# EAGLE board LiPower-Shield-Panel-v11 (EAGLE 6.6.0), part 1 of 2
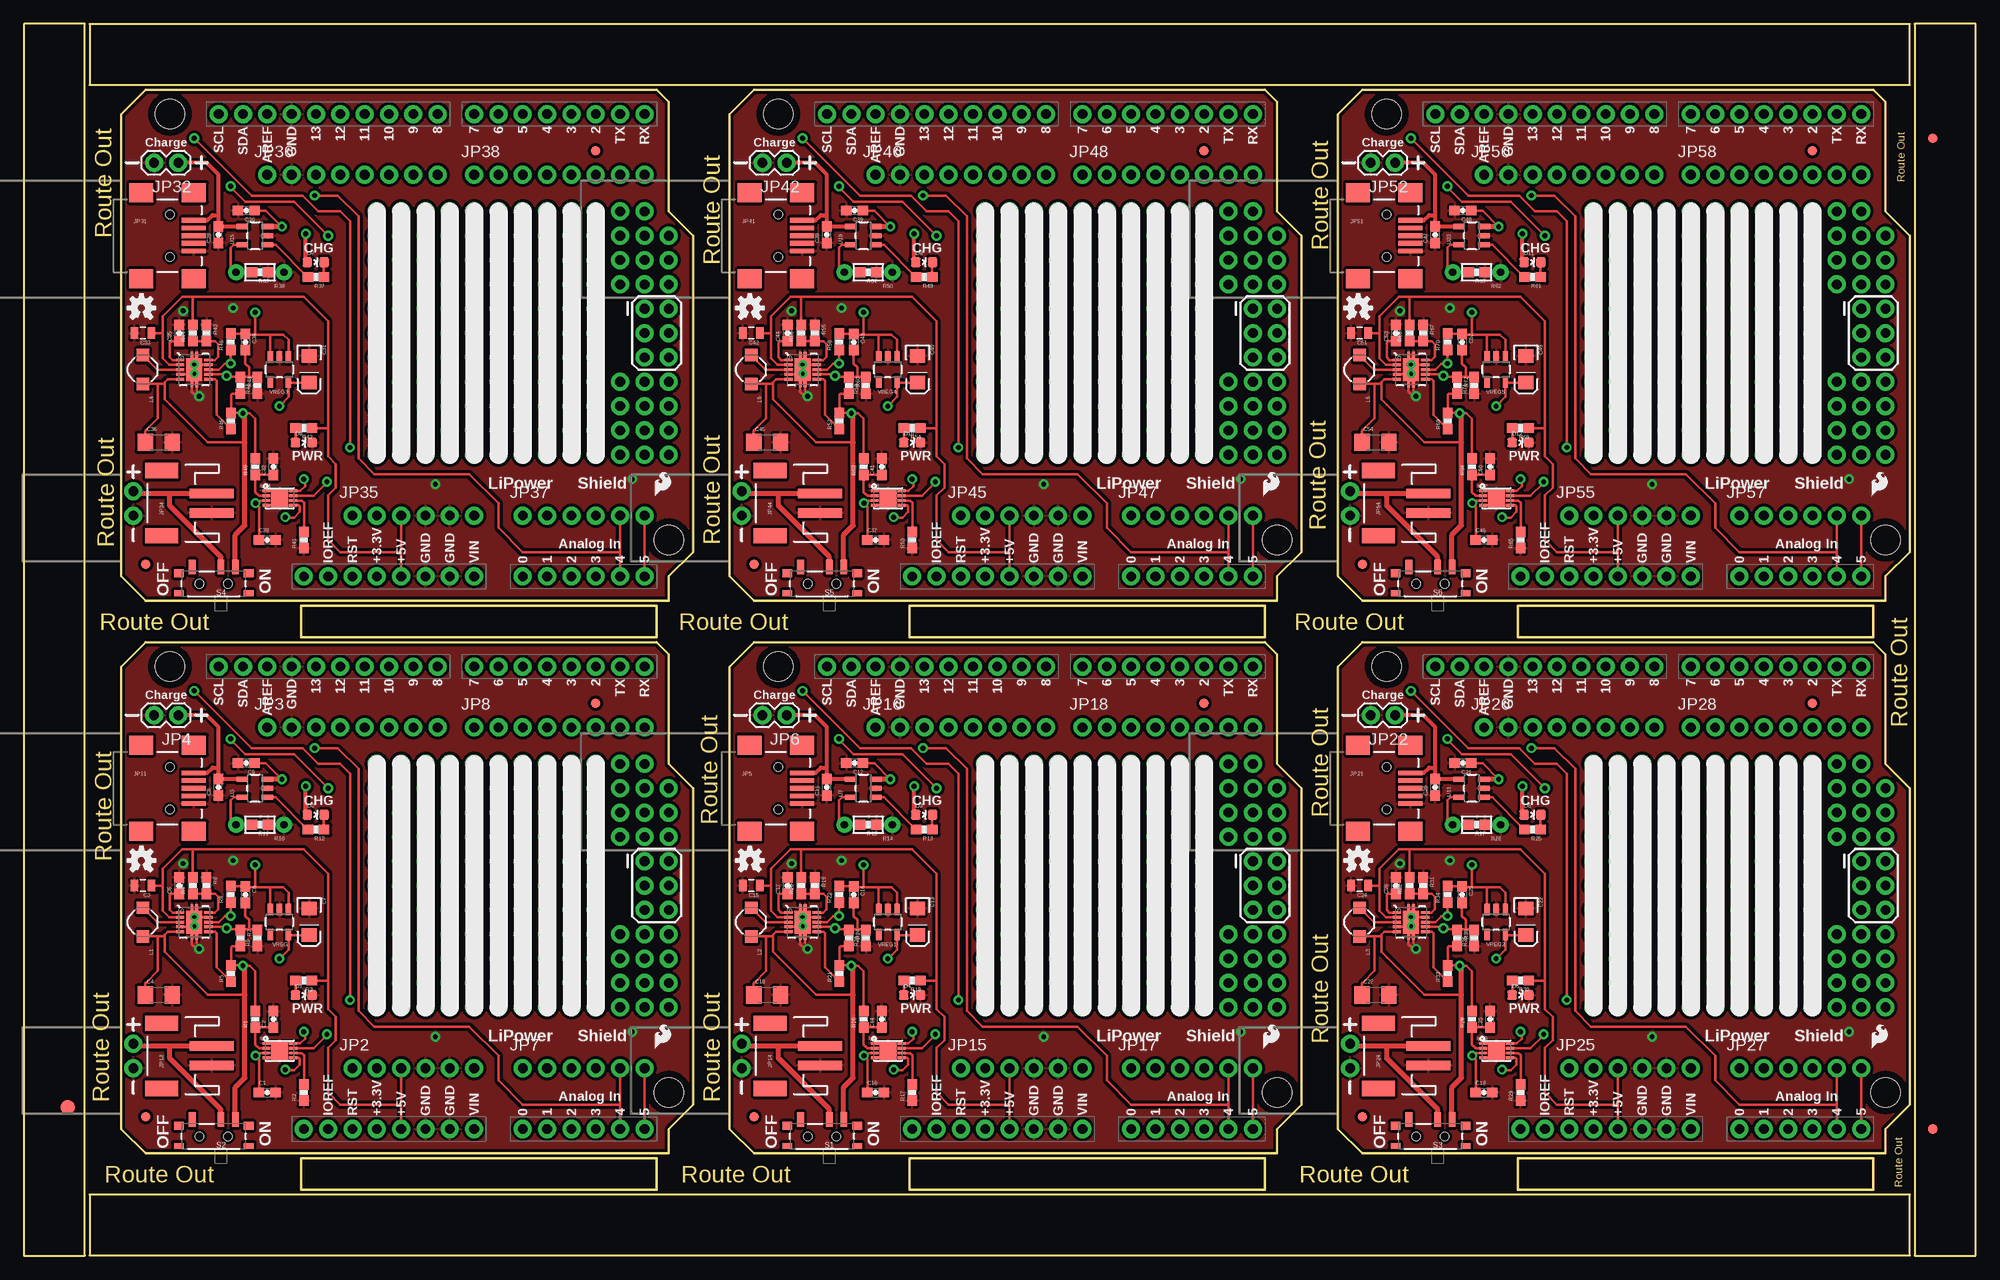
[diagram p0: board, top side]
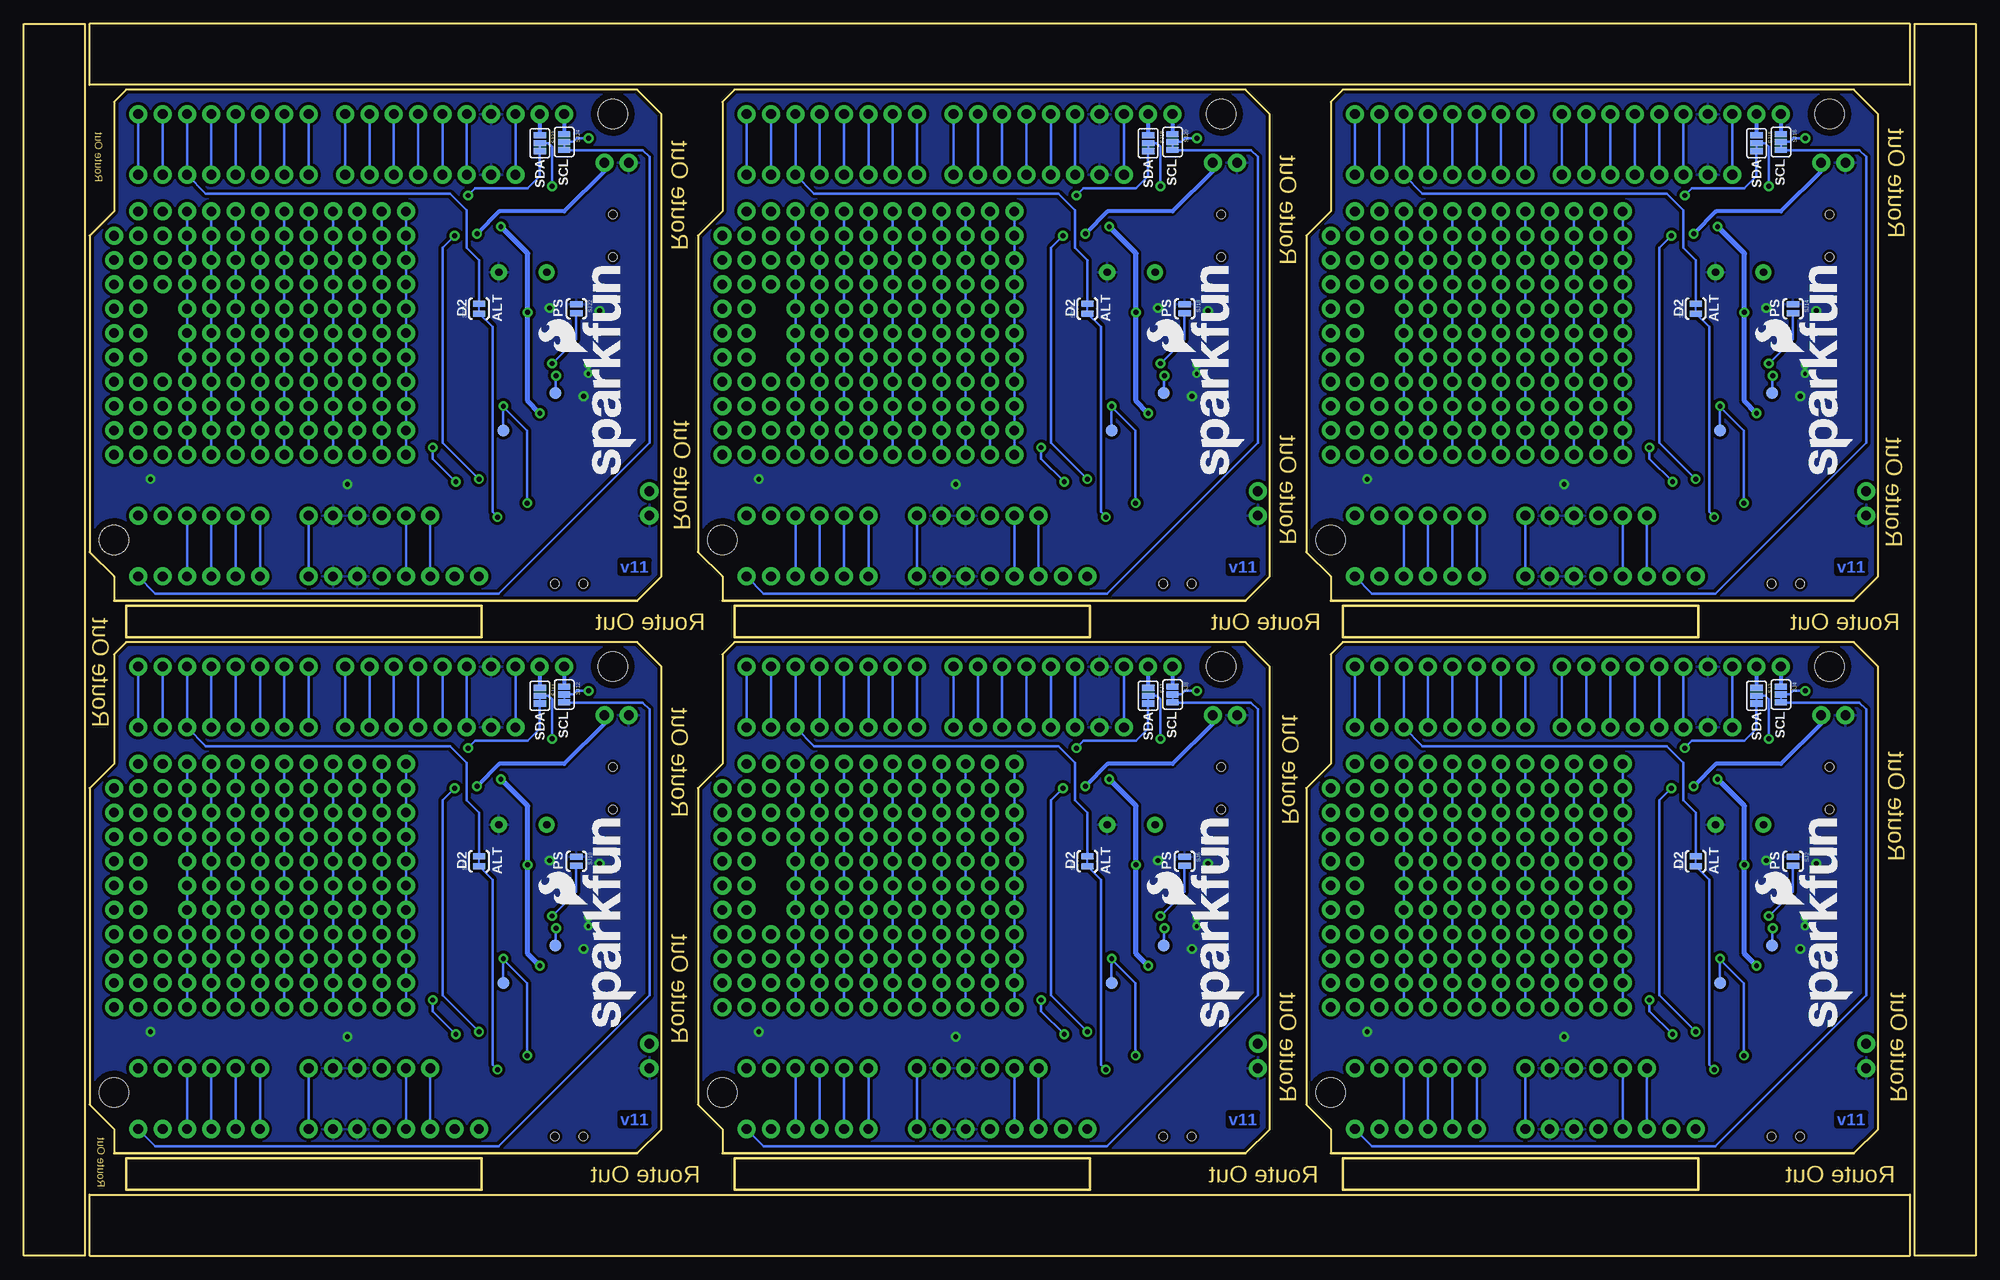
[diagram p1: board, bottom side, seen from below]

Size 203.71 x 128.52 mm. Coordinates in mm from the lower left corner, seen from the top.
Outline: 10.16,13.21 10.16,61.47 12.7,64.01 66.04,64.01 67.31,62.74 67.31,51.31 69.85,48.77 69.85,15.75 67.31,13.21 67.31,10.67 12.7,10.67 10.16,13.21
Outline: 73.66,13.21 73.66,61.47 76.2,64.01 129.54,64.01 130.81,62.74 130.81,51.31 133.35,48.77 133.35,15.75 130.81,13.21 130.81,10.67 76.2,10.67 73.66,13.21
Outline: 137.16,13.21 137.16,61.47 139.7,64.01 193.04,64.01 194.31,62.74 194.31,51.31 196.85,48.77 196.85,15.75 194.31,13.21 194.31,10.67 139.7,10.67 137.16,13.21
Outline: 66.04,10.16 28.96,10.16 28.96,6.86 66.04,6.86 66.04,10.16
Outline: 129.54,10.16 92.46,10.16 92.46,6.86 129.54,6.86 129.54,10.16
Outline: 193.04,10.16 155.96,10.16 155.96,6.86 193.04,6.86 193.04,10.16
Outline: 10.16,70.87 10.16,119.13 12.7,121.67 66.04,121.67 67.31,120.4 67.31,108.97 69.85,106.43 69.85,73.41 67.31,70.87 67.31,68.33 12.7,68.33 10.16,70.87
Outline: 73.66,70.87 73.66,119.13 76.2,121.67 129.54,121.67 130.81,120.4 130.81,108.97 133.35,106.43 133.35,73.41 130.81,70.87 130.81,68.33 76.2,68.33 73.66,70.87
Outline: 137.16,70.87 137.16,119.13 139.7,121.67 193.04,121.67 194.31,120.4 194.31,108.97 196.85,106.43 196.85,73.41 194.31,70.87 194.31,68.33 139.7,68.33 137.16,70.87
Outline: 66.04,67.82 28.96,67.82 28.96,64.52 66.04,64.52 66.04,67.82
Outline: 129.54,67.82 92.46,67.82 92.46,64.52 129.54,64.52 129.54,67.82
Outline: 193.04,67.82 155.96,67.82 155.96,64.52 193.04,64.52 193.04,67.82
Outline: 6.35,0 6.35,128.52 0,128.52 0,0 6.35,0
Outline: 6.86,122.17 196.85,122.17 196.85,128.52 6.86,128.52 6.86,122.17
Outline: 6.86,6.35 6.86,0 196.85,0 196.85,6.35 6.86,6.35
Outline: 203.71,0 203.71,128.52 197.36,128.52 197.36,0 203.71,0
Copper layers (1*16): Top 0.035mm / dielectric 1.5mm / Bottom 0.035mm
Design rules "SparkFun-2-layer": minimum track width 7mil, minimum drill 15mil, track to track 8mil, track to pad 8mil, pad to pad 8mil, via to via 8mil, smd to smd 8mil, copper to edge 8mil, drill to drill 8mil, minimum pad ring 12mil, minimum via ring 10mil, stop-mask expansion 4mil, vias tented up to drill 20mil, thermal gap 10mil

## Footprints (pad centres in the part's own frame; a part is rotated, then mirrored left to right if it is on the bottom)
0603-CAP = smd 1.1 x 1: 1 -0.85,0; 2 0.85,0
0805 = smd 0.8 x 1.2: 1 -0.9,0; 2 0.9,0
1206 = smd 1.6 x 1.8: 1 -1.4,0; 2 1.4,0
EIA3216 = smd 1.4 x 1.6: A 1.4,0; C -1.4,0
LED-0603 = smd 1 x 1: A 0,-0.877; C 0,0.877
FIDUCIAL-1.5X3 = smd 1.5 x 1.5: 1 0,0
FIDUCIAL-1X2 = smd 1 x 1: 1 0,0
1X02_NO_SILK = drill 1.016 pad 1.88: 1 0,0; 2 2.54,0
1X06_NO_SILK = drill 1.016 pad 1.88: 1 0,0; 2 2.54,0; 3 5.08,0; 4 7.62,0; 5 10.16,0; 6 12.7,0
1X08_NO_SILK = drill 1.016 pad 1.88: 1 0,0; 2 2.54,0; 3 5.08,0; 4 7.62,0; 5 10.16,0; 6 12.7,0; 7 15.24,0; 8 17.78,0
1X02 = drill 1.016 pad 1.88: 1 0,0; 2 2.54,0
USB-MINIB = smd 2.5 x 0.5: D+ 2.5,0; D- 2.5,0.8; GND 2.5,-1.6; ID 2.5,-0.8; VBUS 2.5,1.6 | smd 2.5 x 2: MTN1 -3,4.5; MTN2 2.5,4.5; MTN3 -3,-4.5; MTN4 2.5,-4.5 | hole 0.9: 0,2.2; 0,-2.2
STAND-OFF-TIGHT = hole 3.048: 0,0
JST-2-SMD = smd 1 x 4.6: 1 -1,-3.7; 2 1,-3.7 | smd 1.6 x 3.4: NC1 -3.4,1.5; NC2 3.4,1.5
INDUCTOR_4.7UH = smd 1.3 x 1.3: P$1 -1.5,0; P$2 1.5,0
0603-RES = smd 1.1 x 1: 1 -0.85,0; 2 0.85,0
1/6W-RES = drill 0.762 pad 1.676: 1 -2.5,0; 2 2.5,0
SWITCH-SPST-SMD-A = smd 0.7 x 1.5: 1 -2.25,-1.75; 2 -0.75,-1.75; 3 2.25,-1.75 | smd 1 x 0.6: GND1 -3.65,1; GND3 3.65,1 | smd 1 x 0.8: GND2 -3.65,-1.1; GND4 3.65,-1.1 | hole 0.9: -1.5,0; 1.5,0
SJ_2S-TRACE = smd 0.635 x 1.27: 1 -0.508,0; 2 0.508,0
SJ_2S-NO = smd 0.635 x 1.27: 1 -0.45,0; 2 0.45,0
PAD-JUMPER-3-2OF3_NC_BY_TRACE_YES_SILK_FULL_BOX = smd 0.635 x 1.27: 1 -0.813,0; 2 0,0; 3 0.813,0
PAD.03X.05 = smd 1.27 x 1.27: P$1 0,0
TDFN-8 = smd 0.8 x 0.3: 1 -1.4,0.75; 2 -1.4,0.25; 3 -1.4,-0.25; 4 -1.4,-0.75; 5 1.4,-0.75; 6 1.4,-0.25; 7 1.4,0.25; 8 1.4,0.75 | smd 1.73 x 1.88: EP 0,0
QFN-10_PAD = smd 0.297 x 0.85: 1 -1,-1.475; 2 -0.5,-1.475; 3 0,-1.475; 4 0.5,-1.475; 5 1,-1.475; 6 1,1.475; 7 0.5,1.475; 8 0,1.475; 9 -0.5,1.475; 10 -1,1.475 | smd 0.7 x 0.28: 11 -1.5,0.25; 12 -1.5,-0.25; 13 1.5,0.25; 14 1.5,-0.25 | smd 2.4 x 1.65: 15 0,0
SOT23-5 = smd 0.55 x 1.2: 1 -0.95,-1.3; 2 0,-1.3; 3 0.95,-1.3; 4 0.95,1.3; 5 -0.95,1.3
UNO_R3_SHIELD = drill 1.016 pad 1.88: 3.3V 50.8,26.67; 5V 50.8,29.21; A0 50.8,41.91; A1 50.8,44.45; A2 50.8,46.99; A3 50.8,49.53; A4 50.8,52.07; A5 50.8,54.61; AREF 2.54,15.24; D2 2.54,49.53; D3 2.54,46.99; D4 2.54,44.45; D5 2.54,41.91; D6 2.54,39.37; D7 2.54,36.83; D8 2.54,33.02; D9 2.54,30.48; D10 2.54,27.94; D11 2.54,25.4; D12 2.54,22.86; D13 2.54,20.32; GND@0 50.8,31.75; GND@1 50.8,34.29; GND@2 2.54,17.78; IOREF 50.8,21.59; NC 50.8,19.05; RES 50.8,24.13; RX 2.54,54.61; SCL 2.54,10.16; SDA 2.54,12.7; TX 2.54,52.07; VIN 50.8,36.83

## Placement (x,y rotation side)
C1  10nF  [0603-CAP]  25.4,17.02 0 top
C2  1uF  [0603-CAP]  26.04,24.66 90 top
C3  22uF  [0805]  12.42,38.61 180 top
C4  10uF  [1206]  14.07,27.2 0 top
C5  0.1uF  [0603-CAP]  16.21,38.61 90 top
C6  0.1uF  [0603-CAP]  23.11,37.67 270 top
C7  10uF  [EIA3216]  29.77,34.84 270 top
C8  4.7uF  [0603-CAP]  20.3,48.87 90 top
C9  4.7uF  [0603-CAP]  23.19,51.38 180 top
C10  10nF  [0603-CAP]  88.9,17.02 0 top
C11  4.7uF  [0603-CAP]  83.8,48.87 90 top
C12  4.7uF  [0603-CAP]  86.69,51.38 180 top
C13  10uF  [EIA3216]  93.27,34.84 270 top
C14  1uF  [0603-CAP]  89.53,24.66 90 top
C15  22uF  [0805]  75.92,38.61 180 top
C16  0.1uF  [0603-CAP]  86.61,37.67 270 top
C17  0.1uF  [0603-CAP]  79.71,38.61 90 top
C18  10uF  [1206]  77.57,27.2 0 top
C19  10nF  [0603-CAP]  152.4,17.02 0 top
C20  4.7uF  [0603-CAP]  147.3,48.87 90 top
C21  4.7uF  [0603-CAP]  150.19,51.38 180 top
C22  10uF  [EIA3216]  156.77,34.84 270 top
C23  1uF  [0603-CAP]  153.03,24.66 90 top
C24  22uF  [0805]  139.42,38.61 180 top
C25  0.1uF  [0603-CAP]  150.11,37.67 270 top
C26  0.1uF  [0603-CAP]  143.21,38.61 90 top
C27  10uF  [1206]  141.07,27.2 0 top
C28  10nF  [0603-CAP]  25.4,74.68 0 top
C29  4.7uF  [0603-CAP]  20.3,106.53 90 top
C30  4.7uF  [0603-CAP]  23.19,109.04 180 top
C31  10uF  [EIA3216]  29.77,92.49 270 top
C32  1uF  [0603-CAP]  26.04,82.32 90 top
C33  22uF  [0805]  12.42,96.27 180 top
C34  0.1uF  [0603-CAP]  23.11,95.33 270 top
C35  0.1uF  [0603-CAP]  16.21,96.27 90 top
C36  10uF  [1206]  14.07,84.86 0 top
C37  10nF  [0603-CAP]  88.9,74.68 0 top
C38  4.7uF  [0603-CAP]  83.8,106.53 90 top
C39  4.7uF  [0603-CAP]  86.69,109.04 180 top
C40  10uF  [EIA3216]  93.27,92.49 270 top
C41  1uF  [0603-CAP]  89.53,82.32 90 top
C42  22uF  [0805]  75.92,96.27 180 top
C43  0.1uF  [0603-CAP]  86.61,95.33 270 top
C44  0.1uF  [0603-CAP]  79.71,96.27 90 top
C45  10uF  [1206]  77.57,84.86 0 top
C46  10nF  [0603-CAP]  152.4,74.68 0 top
C47  4.7uF  [0603-CAP]  147.3,106.53 90 top
C48  4.7uF  [0603-CAP]  150.19,109.04 180 top
C49  10uF  [EIA3216]  156.77,92.49 270 top
C50  1uF  [0603-CAP]  153.03,82.32 90 top
C51  22uF  [0805]  139.42,96.27 180 top
C52  0.1uF  [0603-CAP]  150.11,95.33 270 top
C53  0.1uF  [0603-CAP]  143.21,96.27 90 top
C54  10uF  [1206]  141.07,84.86 0 top
D1  RED  [LED-0603]  29.21,27.18 270 top
D2  RED  [LED-0603]  30.45,46 270 top
D3  RED  [LED-0603]  93.95,46 270 top
D4  RED  [LED-0603]  92.71,27.18 270 top
D5  RED  [LED-0603]  157.45,46 270 top
D6  RED  [LED-0603]  156.21,27.18 270 top
D7  RED  [LED-0603]  30.45,103.66 270 top
D8  RED  [LED-0603]  29.21,84.84 270 top
D9  RED  [LED-0603]  93.95,103.66 270 top
D10  RED  [LED-0603]  92.71,84.84 270 top
D11  RED  [LED-0603]  157.45,103.66 270 top
D12  RED  [LED-0603]  156.21,84.84 270 top
E$1  [FIDUCIAL-1.5X3]  4.57,15.49 0 top
E$6  [FIDUCIAL-1X2]  199.26,13.21 0 top
E$7  [FIDUCIAL-1X2]  199.26,116.59 180 top
FID1  FIDUCIAL1X2  [FIDUCIAL-1X2]  12.7,14.48 0 top
FID2  FIDUCIAL1X2  [FIDUCIAL-1X2]  59.69,57.66 0 top
FID3  FIDUCIAL1X2  [FIDUCIAL-1X2]  76.2,14.48 0 top
FID4  FIDUCIAL1X2  [FIDUCIAL-1X2]  123.19,57.66 0 top
FID5  FIDUCIAL1X2  [FIDUCIAL-1X2]  139.7,14.48 0 top
FID6  FIDUCIAL1X2  [FIDUCIAL-1X2]  186.69,57.66 0 top
FID7  FIDUCIAL1X2  [FIDUCIAL-1X2]  12.7,72.14 0 top
FID8  FIDUCIAL1X2  [FIDUCIAL-1X2]  59.69,115.32 0 top
FID9  FIDUCIAL1X2  [FIDUCIAL-1X2]  76.2,72.14 0 top
FID10  FIDUCIAL1X2  [FIDUCIAL-1X2]  123.19,115.32 0 top
FID11  FIDUCIAL1X2  [FIDUCIAL-1X2]  139.7,72.14 0 top
FID12  FIDUCIAL1X2  [FIDUCIAL-1X2]  186.69,115.32 0 top
JP1  [1X02_NO_SILK]  11.43,19.56 90 top
JP2  [1X06_NO_SILK]  34.29,19.56 0 top
JP3  [1X08_NO_SILK]  25.4,55.12 0 top
JP4  M02PTH  [1X02]  16.11,56.39 180 top
JP5  USBSMD  [USB-MINIB]  78.74,48.77 0 top
JP6  M02PTH  [1X02]  79.61,56.39 180 top
JP7  [1X06_NO_SILK]  52.07,19.56 0 top
JP8  [1X08_NO_SILK]  46.99,55.12 0 top
JP9  STAND-OFFTIGHT  [STAND-OFF-TIGHT]  15.24,61.47 0 top
JP10  STAND-OFFTIGHT  [STAND-OFF-TIGHT]  67.31,17.02 0 top
JP11  USBSMD  [USB-MINIB]  15.24,48.77 0 top
JP12  [1X02_NO_SILK]  74.93,19.56 90 top
JP13  [JST-2-SMD]  15.88,20.85 90 top
JP14  [JST-2-SMD]  79.38,20.85 90 top
JP15  [1X06_NO_SILK]  97.79,19.56 0 top
JP16  [1X08_NO_SILK]  88.9,55.12 0 top
JP17  [1X06_NO_SILK]  115.57,19.56 0 top
JP18  [1X08_NO_SILK]  110.49,55.12 0 top
JP19  STAND-OFFTIGHT  [STAND-OFF-TIGHT]  78.74,61.47 0 top
JP20  STAND-OFFTIGHT  [STAND-OFF-TIGHT]  130.81,17.02 0 top
JP21  USBSMD  [USB-MINIB]  142.24,48.77 0 top
JP22  M02PTH  [1X02]  143.11,56.39 180 top
JP23  [1X02_NO_SILK]  138.43,19.56 90 top
JP24  [JST-2-SMD]  142.88,20.85 90 top
JP25  [1X06_NO_SILK]  161.29,19.56 0 top
JP26  [1X08_NO_SILK]  152.4,55.12 0 top
JP27  [1X06_NO_SILK]  179.07,19.56 0 top
JP28  [1X08_NO_SILK]  173.99,55.12 0 top
JP29  STAND-OFFTIGHT  [STAND-OFF-TIGHT]  142.24,61.47 0 top
JP30  STAND-OFFTIGHT  [STAND-OFF-TIGHT]  194.31,17.02 0 top
JP31  USBSMD  [USB-MINIB]  15.24,106.43 0 top
JP32  M02PTH  [1X02]  16.11,114.05 180 top
JP33  [1X02_NO_SILK]  11.43,77.22 90 top
JP34  [JST-2-SMD]  15.88,78.51 90 top
JP35  [1X06_NO_SILK]  34.29,77.22 0 top
JP36  [1X08_NO_SILK]  25.4,112.78 0 top
JP37  [1X06_NO_SILK]  52.07,77.22 0 top
JP38  [1X08_NO_SILK]  46.99,112.78 0 top
JP39  STAND-OFFTIGHT  [STAND-OFF-TIGHT]  15.24,119.13 0 top
JP40  STAND-OFFTIGHT  [STAND-OFF-TIGHT]  67.31,74.68 0 top
JP41  USBSMD  [USB-MINIB]  78.74,106.43 0 top
JP42  M02PTH  [1X02]  79.61,114.05 180 top
JP43  [1X02_NO_SILK]  74.93,77.22 90 top
JP44  [JST-2-SMD]  79.38,78.51 90 top
JP45  [1X06_NO_SILK]  97.79,77.22 0 top
JP46  [1X08_NO_SILK]  88.9,112.78 0 top
JP47  [1X06_NO_SILK]  115.57,77.22 0 top
JP48  [1X08_NO_SILK]  110.49,112.78 0 top
JP49  STAND-OFFTIGHT  [STAND-OFF-TIGHT]  78.74,119.13 0 top
JP50  STAND-OFFTIGHT  [STAND-OFF-TIGHT]  130.81,74.68 0 top
JP51  USBSMD  [USB-MINIB]  142.24,106.43 0 top
JP52  M02PTH  [1X02]  143.11,114.05 180 top
JP53  [1X02_NO_SILK]  138.43,77.22 90 top
JP54  [JST-2-SMD]  142.88,78.51 90 top
JP55  [1X06_NO_SILK]  161.29,77.22 0 top
JP56  [1X08_NO_SILK]  152.4,112.78 0 top
JP57  [1X06_NO_SILK]  179.07,77.22 0 top
JP58  [1X08_NO_SILK]  173.99,112.78 0 top
JP59  STAND-OFFTIGHT  [STAND-OFF-TIGHT]  142.24,119.13 0 top
JP60  STAND-OFFTIGHT  [STAND-OFF-TIGHT]  194.31,74.68 0 top
L1  4.7uH, 1.2A  [INDUCTOR_4.7UH]  12.42,34.8 270 top
L2  4.7uH, 1.2A  [INDUCTOR_4.7UH]  75.92,34.8 270 top
L3  4.7uH, 1.2A  [INDUCTOR_4.7UH]  139.42,34.8 270 top
L4  4.7uH, 1.2A  [INDUCTOR_4.7UH]  12.42,92.46 270 top
L5  4.7uH, 1.2A  [INDUCTOR_4.7UH]  75.92,92.46 270 top
L6  4.7uH, 1.2A  [INDUCTOR_4.7UH]  139.42,92.46 270 top
LOGO1  OSHW-LOGOS  [OSHW-LOGO-S]  12.25,41.22 0 top
LOGO2  SFE_LOGO_NAME_FLAME.2_INCH  [SFE_LOGO_NAME_FLAME_.2]  12.7,23.11 90 bottom
LOGO3  SFE_LOGO_FLAME.1_INCH  [SFE_LOGO_FLAME_.1]  65.53,21.21 0 top
LOGO4  OSHW-LOGOS  [OSHW-LOGO-S]  75.75,41.22 0 top
LOGO5  SFE_LOGO_NAME_FLAME.2_INCH  [SFE_LOGO_NAME_FLAME_.2]  76.2,23.11 90 bottom
LOGO6  SFE_LOGO_FLAME.1_INCH  [SFE_LOGO_FLAME_.1]  129.03,21.21 0 top
LOGO7  OSHW-LOGOS  [OSHW-LOGO-S]  139.25,41.22 0 top
LOGO8  SFE_LOGO_NAME_FLAME.2_INCH  [SFE_LOGO_NAME_FLAME_.2]  139.7,23.11 90 bottom
LOGO9  SFE_LOGO_FLAME.1_INCH  [SFE_LOGO_FLAME_.1]  192.53,21.21 0 top
LOGO10  OSHW-LOGOS  [OSHW-LOGO-S]  12.25,98.88 0 top
LOGO11  SFE_LOGO_NAME_FLAME.2_INCH  [SFE_LOGO_NAME_FLAME_.2]  12.7,80.77 90 bottom
LOGO12  SFE_LOGO_FLAME.1_INCH  [SFE_LOGO_FLAME_.1]  65.53,78.87 0 top
LOGO13  OSHW-LOGOS  [OSHW-LOGO-S]  75.75,98.88 0 top
LOGO14  SFE_LOGO_NAME_FLAME.2_INCH  [SFE_LOGO_NAME_FLAME_.2]  76.2,80.77 90 bottom
LOGO15  SFE_LOGO_FLAME.1_INCH  [SFE_LOGO_FLAME_.1]  129.03,78.87 0 top
LOGO16  OSHW-LOGOS  [OSHW-LOGO-S]  139.25,98.88 0 top
LOGO17  SFE_LOGO_NAME_FLAME.2_INCH  [SFE_LOGO_NAME_FLAME_.2]  139.7,80.77 90 bottom
LOGO18  SFE_LOGO_FLAME.1_INCH  [SFE_LOGO_FLAME_.1]  192.53,78.87 0 top
R1  1k  [0603-RES]  24.16,24.66 90 top
R2  4.7k  [0603-RES]  29.21,17.02 90 top
R3  330  [0603-RES]  29.21,28.7 180 top
R4  2M  [0603-RES]  17.63,38.61 90 top
R5  10k  [0603-RES]  21.62,29.44 90 top
R6  220k  [0603-RES]  19.05,38.61 270 top
R7  2.0M  [0603-RES]  22.61,33.15 270 top
R8  10k  [0603-RES]  21.59,37.69 90 top
R9  200k  [0603-RES]  24.38,33.15 90 top
R10  DNP  [1/6W-RES]  24.64,44.96 180 top
R11  10k  [0603-RES]  24.64,44.96 180 top
R12  330  [0603-RES]  30.48,44.45 180 top
R13  330  [0603-RES]  93.98,44.45 180 top
R14  DNP  [1/6W-RES]  88.14,44.96 180 top
R15  10k  [0603-RES]  88.14,44.96 180 top
R16  1k  [0603-RES]  87.66,24.66 90 top
R17  4.7k  [0603-RES]  92.71,17.02 90 top
R18  330  [0603-RES]  92.71,28.7 180 top
R19  220k  [0603-RES]  82.55,38.61 270 top
R20  2M  [0603-RES]  81.13,38.61 90 top
R21  10k  [0603-RES]  85.12,29.44 90 top
R22  10k  [0603-RES]  85.09,37.69 90 top
R23  200k  [0603-RES]  87.88,33.15 90 top
R24  2.0M  [0603-RES]  86.11,33.15 270 top
R25  330  [0603-RES]  157.48,44.45 180 top
R26  DNP  [1/6W-RES]  151.64,44.96 180 top
R27  10k  [0603-RES]  151.64,44.96 180 top
R28  1k  [0603-RES]  151.16,24.66 90 top
R29  4.7k  [0603-RES]  156.21,17.02 90 top
R30  330  [0603-RES]  156.21,28.7 180 top
R31  220k  [0603-RES]  146.05,38.61 270 top
R32  2M  [0603-RES]  144.63,38.61 90 top
R33  10k  [0603-RES]  148.62,29.44 90 top
R34  10k  [0603-RES]  148.59,37.69 90 top
R35  200k  [0603-RES]  151.38,33.15 90 top
R36  2.0M  [0603-RES]  149.61,33.15 270 top
R37  330  [0603-RES]  30.48,102.11 180 top
R38  DNP  [1/6W-RES]  24.64,102.62 180 top
R39  10k  [0603-RES]  24.64,102.62 180 top
R40  1k  [0603-RES]  24.16,82.32 90 top
R41  4.7k  [0603-RES]  29.21,74.68 90 top
R42  330  [0603-RES]  29.21,86.36 180 top
R43  220k  [0603-RES]  19.05,96.27 270 top
R44  2M  [0603-RES]  17.63,96.27 90 top
R45  10k  [0603-RES]  21.62,87.1 90 top
R46  10k  [0603-RES]  21.59,95.35 90 top
R47  200k  [0603-RES]  24.38,90.81 90 top
R48  2.0M  [0603-RES]  22.61,90.81 270 top
R49  330  [0603-RES]  93.98,102.11 180 top
R50  DNP  [1/6W-RES]  88.14,102.62 180 top
R51  10k  [0603-RES]  88.14,102.62 180 top
R52  1k  [0603-RES]  87.66,82.32 90 top
R53  4.7k  [0603-RES]  92.71,74.68 90 top
R54  330  [0603-RES]  92.71,86.36 180 top
R55  220k  [0603-RES]  82.55,96.27 270 top
R56  2M  [0603-RES]  81.13,96.27 90 top
R57  10k  [0603-RES]  85.12,87.1 90 top
R58  10k  [0603-RES]  85.09,95.35 90 top
R59  200k  [0603-RES]  87.88,90.81 90 top
R60  2.0M  [0603-RES]  86.11,90.81 270 top
R61  330  [0603-RES]  157.48,102.11 180 top
R62  DNP  [1/6W-RES]  151.64,102.62 180 top
R63  10k  [0603-RES]  151.64,102.62 180 top
R64  1k  [0603-RES]  151.16,82.32 90 top
R65  4.7k  [0603-RES]  156.21,74.68 90 top
R66  330  [0603-RES]  156.21,86.36 180 top
R67  220k  [0603-RES]  146.05,96.27 270 top
R68  2M  [0603-RES]  144.63,96.27 90 top
R69  10k  [0603-RES]  148.62,87.1 90 top
R70  10k  [0603-RES]  148.59,95.35 90 top
R71  200k  [0603-RES]  151.38,90.81 90 top
R72  2.0M  [0603-RES]  149.61,90.81 270 top
S1  [SWITCH-SPST-SMD-A]  83.31,12.45 180 top
S2  [SWITCH-SPST-SMD-A]  19.81,12.45 180 top
S3  [SWITCH-SPST-SMD-A]  146.81,12.45 180 top
S4  [SWITCH-SPST-SMD-A]  19.81,70.1 180 top
S5  [SWITCH-SPST-SMD-A]  83.31,70.1 180 top
S6  [SWITCH-SPST-SMD-A]  146.81,70.1 180 top
SJ1  SOLDERJUMPERTRACE  [SJ_2S-TRACE]  29.21,41.15 90 bottom
SJ2  PS  [SJ_2S-NO]  19.05,41.15 270 bottom
SJ3  SDA  [PAD-JUMPER-3-2OF3_NC_BY_TRACE_YES_SILK_FULL_BOX]  22.86,58.42 270 bottom
SJ4  SCL  [PAD-JUMPER-3-2OF3_NC_BY_TRACE_YES_SILK_FULL_BOX]  20.32,58.55 270 bottom
SJ5  SOLDERJUMPERTRACE  [SJ_2S-TRACE]  92.71,41.15 90 bottom
SJ6  PS  [SJ_2S-NO]  82.55,41.15 270 bottom
SJ7  SDA  [PAD-JUMPER-3-2OF3_NC_BY_TRACE_YES_SILK_FULL_BOX]  86.36,58.42 270 bottom
SJ8  SCL  [PAD-JUMPER-3-2OF3_NC_BY_TRACE_YES_SILK_FULL_BOX]  83.82,58.55 270 bottom
SJ9  SOLDERJUMPERTRACE  [SJ_2S-TRACE]  156.21,41.15 90 bottom
SJ10  PS  [SJ_2S-NO]  146.05,41.15 270 bottom
SJ11  SDA  [PAD-JUMPER-3-2OF3_NC_BY_TRACE_YES_SILK_FULL_BOX]  149.86,58.42 270 bottom
SJ12  SCL  [PAD-JUMPER-3-2OF3_NC_BY_TRACE_YES_SILK_FULL_BOX]  147.32,58.55 270 bottom
SJ13  SOLDERJUMPERTRACE  [SJ_2S-TRACE]  29.21,98.81 90 bottom
SJ14  PS  [SJ_2S-NO]  19.05,98.81 270 bottom
SJ15  SDA  [PAD-JUMPER-3-2OF3_NC_BY_TRACE_YES_SILK_FULL_BOX]  22.86,116.08 270 bottom
SJ16  SCL  [PAD-JUMPER-3-2OF3_NC_BY_TRACE_YES_SILK_FULL_BOX]  20.32,116.2 270 bottom
SJ17  SOLDERJUMPERTRACE  [SJ_2S-TRACE]  92.71,98.81 90 bottom
SJ18  PS  [SJ_2S-NO]  82.55,98.81 270 bottom
SJ19  SDA  [PAD-JUMPER-3-2OF3_NC_BY_TRACE_YES_SILK_FULL_BOX]  86.36,116.08 270 bottom
SJ20  SCL  [PAD-JUMPER-3-2OF3_NC_BY_TRACE_YES_SILK_FULL_BOX]  83.82,116.2 270 bottom
SJ21  SOLDERJUMPERTRACE  [SJ_2S-TRACE]  156.21,98.81 90 bottom
SJ22  PS  [SJ_2S-NO]  146.05,98.81 270 bottom
SJ23  SDA  [PAD-JUMPER-3-2OF3_NC_BY_TRACE_YES_SILK_FULL_BOX]  149.86,116.08 270 bottom
SJ24  SCL  [PAD-JUMPER-3-2OF3_NC_BY_TRACE_YES_SILK_FULL_BOX]  147.32,116.2 270 bottom
TP1  TEST-POINT3X5  [PAD.03X.05]  21.24,32.38 0 bottom
TP2  TEST-POINT3X5  [PAD.03X.05]  26.67,28.45 0 bottom
TP3  TEST-POINT3X5  [PAD.03X.05]  84.74,32.38 0 bottom
TP4  TEST-POINT3X5  [PAD.03X.05]  90.17,28.45 0 bottom
TP5  TEST-POINT3X5  [PAD.03X.05]  148.24,32.38 0 bottom
TP6  TEST-POINT3X5  [PAD.03X.05]  153.67,28.45 0 bottom
TP7  TEST-POINT3X5  [PAD.03X.05]  21.24,90.04 0 bottom
TP8  TEST-POINT3X5  [PAD.03X.05]  26.67,86.11 0 bottom
TP9  TEST-POINT3X5  [PAD.03X.05]  84.74,90.04 0 bottom
TP10  TEST-POINT3X5  [PAD.03X.05]  90.17,86.11 0 bottom
TP11  TEST-POINT3X5  [PAD.03X.05]  148.24,90.04 0 bottom
TP12  TEST-POINT3X5  [PAD.03X.05]  153.67,86.11 0 bottom
U1  MAX17043G+U  [TDFN-8]  26.7,21.39 0 top
U2  TPS61200  [QFN-10_PAD]  17.78,34.8 270 top
U3  MCP73831  [SOT23-5]  24.13,48.77 90 top
U4  ARDUINO_R3_SHIELD  [UNO_R3_SHIELD]  10.16,64.01 270 top
U5  ARDUINO_R3_SHIELD  [UNO_R3_SHIELD]  73.66,64.01 270 top
U6  MAX17043G+U  [TDFN-8]  90.2,21.39 0 top
U7  MCP73831  [SOT23-5]  87.63,48.77 90 top
U8  TPS61200  [QFN-10_PAD]  81.28,34.8 270 top
U9  ARDUINO_R3_SHIELD  [UNO_R3_SHIELD]  137.16,64.01 270 top
U10  MAX17043G+U  [TDFN-8]  153.7,21.39 0 top
U11  MCP73831  [SOT23-5]  151.13,48.77 90 top
U12  TPS61200  [QFN-10_PAD]  144.78,34.8 270 top
U13  ARDUINO_R3_SHIELD  [UNO_R3_SHIELD]  10.16,121.67 270 top
U14  MAX17043G+U  [TDFN-8]  26.7,79.04 0 top
U15  MCP73831  [SOT23-5]  24.13,106.43 90 top
U16  TPS61200  [QFN-10_PAD]  17.78,92.46 270 top
U17  ARDUINO_R3_SHIELD  [UNO_R3_SHIELD]  73.66,121.67 270 top
U18  MAX17043G+U  [TDFN-8]  90.2,79.04 0 top
U19  MCP73831  [SOT23-5]  87.63,106.43 90 top
U20  TPS61200  [QFN-10_PAD]  81.28,92.46 270 top
U21  ARDUINO_R3_SHIELD  [UNO_R3_SHIELD]  137.16,121.67 270 top
U22  MAX17043G+U  [TDFN-8]  153.7,79.04 0 top
U23  MCP73831  [SOT23-5]  151.13,106.43 90 top
U24  TPS61200  [QFN-10_PAD]  144.78,92.46 270 top
VREG  MIC5205-3.3V  [SOT23-5]  26.67,34.8 180 top
VREG1  MIC5205-3.3V  [SOT23-5]  90.17,34.8 180 top
VREG2  MIC5205-3.3V  [SOT23-5]  153.67,34.8 180 top
VREG3  MIC5205-3.3V  [SOT23-5]  26.67,92.46 180 top
VREG4  MIC5205-3.3V  [SOT23-5]  90.17,92.46 180 top
VREG5  MIC5205-3.3V  [SOT23-5]  153.67,92.46 180 top

## Library data of the parts
C1 C10 C19 C28 C37 C46 = SparkFun-Capacitors; PROD_ID: CAP-00867
C2 C14 C23 C32 C41 C50 = SparkFun-Capacitors; PROD_ID: CAP-00868
C3 C15 C24 C33 C42 C51 = SparkFun-Capacitors; PROD_ID: CAP-08402
C4 C18 C27 C36 C45 C54 = SparkFun-Capacitors; PROD_ID: CAP-10057
C5 C6 C16 C17 C25 C26 C34 C35 C43 C44 C52 C53 = SparkFun-Capacitors; PROD_ID: CAP-00810
C7 C13 C22 C31 C40 C49 = SparkFun-Capacitors; PROD_ID: CAP-00811
C8 C9 C11 C12 C20 C21 C29 C30 C38 C39 C47 C48 = SparkFun-Capacitors; PROD_ID: CAP-08280
D1-D12 = SparkFun-LED; PROD_ID: DIO-00819
E$1 = SparkFun-Retired
E$6 E$7 FID1-FID12 LOGO1-LOGO18 = SparkFun-Aesthetics
JP1 JP9 JP10 JP12 JP19 JP20 JP23 JP29 JP30 JP33 JP39 JP40 JP43 JP49 JP50 JP53 JP59 JP60 SJ1 SJ2 SJ5 SJ6 SJ9 SJ10 SJ13 SJ14 SJ17 SJ18 SJ21 SJ22 = SparkFun
JP2-JP4 JP6-JP8 JP15-JP18 JP22 JP25-JP28 JP32 JP35-JP38 JP42 JP45-JP48 JP52 JP55-JP58 = SparkFun-Connectors
JP5 JP11 JP21 JP31 JP41 JP51 = SparkFun-Connectors; PROD_ID: CONN-08193
JP13 JP14 JP24 JP34 JP44 JP54 = SparkFun-Connectors; PROD_ID: CONN-08352
L1-L6 = SparkFun-Passives; PROD_ID: NDUC-10146
R1 R16 R28 R40 R52 R64 = SparkFun-Resistors; PROD_ID: RES-07856
R2 R17 R29 R41 R53 R65 = SparkFun-Resistors; PROD_ID: RES-07857
R3 R12 R13 R18 R25 R30 R37 R42 R49 R54 R61 R66 = SparkFun-Resistors; PROD_ID: RES-00818
R4 R7 R20 R24 R32 R36 R44 R48 R56 R60 R68 R72 = SparkFun-Resistors; PROD_ID: RES-10054
R5 R8 R11 R15 R21 R22 R27 R33 R34 R39 R45 R46 R51 R57 R58 R63 R69 R70 = SparkFun-Resistors; PROD_ID: RES-00824
R6 R19 R31 R43 R55 R67 = SparkFun-Resistors; PROD_ID: RES-08969
R9 R23 R35 R47 R59 R71 = SparkFun-Resistors; PROD_ID: RES-09385
R10 R14 R26 R38 R50 R62 = SparkFun-Resistors
S1-S6 = SparkFun-Electromechanical
SJ3 SJ4 SJ7 SJ8 SJ11 SJ12 SJ15 SJ16 SJ19 SJ20 SJ23 SJ24 TP1-TP12 = SparkFun-Passives
U1 U6 U10 U14 U18 U22 = SparkFun-PowerIC; PROD-ID: IC-10399
U2 U8 U12 U16 U20 U24 = SparkFun-PowerIC; PROD_ID: IC-10035
U3 U7 U11 U15 U19 U23 = SparkFun-PowerIC; PROD_ID: IC-09995
U4 U5 U9 U13 U17 U21 = SparkFun-Boards
VREG VREG1-VREG5 = SparkFun-PowerIC; PROD_ID: VREG-00822

## Nets
3.3-ARDUINO: JP2.2 U4.3.3V
3.3-ARDUINO1: JP15.2 U5.3.3V
3.3-ARDUINO2: JP25.2 U9.3.3V
3.3-ARDUINO3: JP35.2 U13.3.3V
3.3-ARDUINO4: JP45.2 U17.3.3V
3.3-ARDUINO5: JP55.2 U21.3.3V
3.3V: C1.1 C7.A TP2.P$1 U1.3 VREG.5
3.3V1: C10.1 C13.A TP4.P$1 U6.3 VREG1.5
3.3V2: C19.1 C22.A TP6.P$1 U10.3 VREG2.5
3.3V3: C28.1 C31.A TP8.P$1 U14.3 VREG3.5
3.3V4: C37.1 C40.A TP10.P$1 U18.3 VREG4.5
3.3V5: C46.1 C49.A TP12.P$1 U22.3 VREG5.5
5V: C3.1 JP2.3 R3.1 R4.2 U2.2 U4.5V
5V1: C15.1 JP15.3 R18.1 R20.2 U5.5V U8.2
5V2: C24.1 JP25.3 R30.1 R32.2 U9.5V U12.2
5V3: C33.1 JP35.3 R42.1 R44.2 U13.5V U16.2
5V4: C42.1 JP45.3 R54.1 R56.2 U17.5V U20.2
5V5: C51.1 JP55.3 R66.1 R68.2 U21.5V U24.2
A0: JP7.1 U4.A0
A1: JP7.2 U4.A1
A2: JP7.3 U4.A2
A3: JP7.4 U4.A3
A4: JP17.4 U5.A3
A5: JP17.3 U5.A2
A6: JP17.2 U5.A1
A7: JP17.1 U5.A0
A8: JP27.4 U9.A3
A9: JP27.3 U9.A2
A10: JP27.2 U9.A1
A11: JP27.1 U9.A0
A12: JP37.4 U13.A3
A13: JP37.3 U13.A2
A14: JP37.2 U13.A1
A15: JP37.1 U13.A0
A16: JP47.4 U17.A3
A17: JP47.3 U17.A2
A18: JP47.2 U17.A1
A19: JP47.1 U17.A0
A20: JP57.4 U21.A3
A21: JP57.3 U21.A2
A22: JP57.2 U21.A1
A23: JP57.1 U21.A0
ALT: SJ1.1 U1.5
ALT1: SJ5.1 U6.5
ALT2: SJ9.1 U10.5
ALT3: SJ13.1 U14.5
ALT4: SJ17.1 U18.5
ALT5: SJ21.1 U22.5
AREF: JP3.1 U4.AREF
AREF1: JP16.1 U5.AREF
AREF2: JP26.1 U9.AREF
AREF3: JP36.1 U13.AREF
AREF4: JP46.1 U17.AREF
AREF5: JP56.1 U21.AREF
CELL: C2.1 R1.1 U1.2
CELL1: C14.1 R16.1 U6.2
CELL2: C23.1 R28.1 U10.2
CELL3: C32.1 R40.1 U14.2
CELL4: C41.1 R52.1 U18.2
CELL5: C50.1 R64.1 U22.2
D1: JP18.5 U5.D3
D2: JP8.6 SJ1.2 U4.D2
D3: JP8.5 U4.D3
D4: JP8.4 U4.D4
D5: JP8.3 U4.D5
D6: JP8.2 U4.D6
D7: JP8.1 U4.D7
D8: JP3.8 U4.D8
D9: JP3.7 U4.D9
D10: JP3.6 U4.D10
D11: JP3.5 U4.D11
D12: JP3.4 U4.D12
D13: JP3.3 U4.D13
D14: JP18.4 U5.D4
D15: JP18.3 U5.D5
D16: JP18.1 U5.D7
D17: JP18.2 U5.D6
D18: JP16.8 U5.D8
D19: JP16.7 U5.D9
D20: JP16.6 U5.D10
D21: JP16.5 U5.D11
D22: JP16.4 U5.D12
D23: JP16.3 U5.D13
D24: JP18.6 SJ5.2 U5.D2
D25: JP28.5 U9.D3
D26: JP28.4 U9.D4
D27: JP28.3 U9.D5
D28: JP28.1 U9.D7
D29: JP28.2 U9.D6
D30: JP26.8 U9.D8
D31: JP26.7 U9.D9
D32: JP26.6 U9.D10
D33: JP26.5 U9.D11
D34: JP26.4 U9.D12
D35: JP26.3 U9.D13
D36: JP28.6 SJ9.2 U9.D2
D37: JP38.5 U13.D3
D38: JP38.4 U13.D4
D39: JP38.3 U13.D5
D40: JP38.1 U13.D7
D41: JP38.2 U13.D6
D42: JP36.8 U13.D8
D43: JP36.7 U13.D9
D44: JP36.6 U13.D10
D45: JP36.5 U13.D11
D46: JP36.4 U13.D12
D47: JP36.3 U13.D13
D48: JP38.6 SJ13.2 U13.D2
D49: JP48.5 U17.D3
D50: JP48.4 U17.D4
D51: JP48.3 U17.D5
D52: JP48.1 U17.D7
D53: JP48.2 U17.D6
D54: JP46.8 U17.D8
D55: JP46.7 U17.D9
D56: JP46.6 U17.D10
D57: JP46.5 U17.D11
D58: JP46.4 U17.D12
D59: JP46.3 U17.D13
D60: JP48.6 SJ17.2 U17.D2
D61: JP58.5 U21.D3
D62: JP58.4 U21.D4
D63: JP58.3 U21.D5
D64: JP58.1 U21.D7
D65: JP58.2 U21.D6
D66: JP56.8 U21.D8
D67: JP56.7 U21.D9
D68: JP56.6 U21.D10
D69: JP56.5 U21.D11
D70: JP56.4 U21.D12
D71: JP56.3 U21.D13
D72: JP58.6 SJ21.2 U21.D2
EN: R5.1 U2.6
EN1: R21.1 U8.6
EN2: R33.1 U12.6
EN3: R45.1 U16.6
EN4: R57.1 U20.6
EN5: R69.1 U24.6
FB: R4.1 R6.2 U2.10
FB1: R19.2 R20.1 U8.10
FB2: R31.2 R32.1 U12.10
FB3: R43.2 R44.1 U16.10
FB4: R55.2 R56.1 U20.10
FB5: R67.2 R68.1 U24.10
GND: C1.2 C2.2 C3.2 C4.2 C5.2 C7.C C8.1 C9.2 D1.C JP1.1 JP2.4 JP2.5 JP3.2 JP4.2 JP11.GND JP13.1 R2.1 R6.1 R9.1 R10.1 R11.1 SJ2.1 U1.1 U1.4 U1.EP U2.4 U2.9 U2.11 U2.12 U2.13 U2.14 U2.15 U3.2 U4.GND@0 U4.GND@1 U4.GND@2 VREG.2
GND1: C10.2 C11.1 C12.2 C13.C C14.2 C15.2 C17.2 C18.2 D4.C JP5.GND JP6.2 JP12.1 JP14.1 JP15.4 JP15.5 JP16.2 R14.1 R15.1 R17.1 R19.1 R23.1 SJ6.1 U5.GND@0 U5.GND@1 U5.GND@2 U6.1 U6.4 U6.EP U7.2 U8.4 U8.9 U8.11 U8.12 U8.13 U8.14 U8.15 VREG1.2
GND2: C19.2 C20.1 C21.2 C22.C C23.2 C24.2 C26.2 C27.2 D6.C JP21.GND JP22.2 JP23.1 JP24.1 JP25.4 JP25.5 JP26.2 R26.1 R27.1 R29.1 R31.1 R35.1 SJ10.1 U9.GND@0 U9.GND@1 U9.GND@2 U10.1 U10.4 U10.EP U11.2 U12.4 U12.9 U12.11 U12.12 U12.13 U12.14 U12.15 VREG2.2
GND3: C28.2 C29.1 C30.2 C31.C C32.2 C33.2 C35.2 C36.2 D8.C JP31.GND JP32.2 JP33.1 JP34.1 JP35.4 JP35.5 JP36.2 R38.1 R39.1 R41.1 R43.1 R47.1 SJ14.1 U13.GND@0 U13.GND@1 U13.GND@2 U14.1 U14.4 U14.EP U15.2 U16.4 U16.9 U16.11 U16.12 U16.13 U16.14 U16.15 VREG3.2
GND4: C37.2 C38.1 C39.2 C40.C C41.2 C42.2 C44.2 C45.2 D10.C JP41.GND JP42.2 JP43.1 JP44.1 JP45.4 JP45.5 JP46.2 R50.1 R51.1 R53.1 R55.1 R59.1 SJ18.1 U17.GND@0 U17.GND@1 U17.GND@2 U18.1 U18.4 U18.EP U19.2 U20.4 U20.9 U20.11 U20.12 U20.13 U20.14 U20.15 VREG4.2
GND5: C46.2 C47.1 C48.2 C49.C C50.2 C51.2 C53.2 C54.2 D12.C JP51.GND JP52.2 JP53.1 JP54.1 JP55.4 JP55.5 JP56.2 R62.1 R63.1 R65.1 R67.1 R71.1 SJ22.1 U21.GND@0 U21.GND@1 U21.GND@2 U22.1 U22.4 U22.EP U23.2 U24.4 U24.9 U24.11 U24.12 U24.13 U24.14 U24.15 VREG5.2
N$1: D1.A R3.2
N$3: L1.P$1 U2.3
N$4: C5.1 U2.1
N$5: D2.C R12.1
N$7: JP1.2 JP13.2 S2.2
N$20: SJ3.2 U1.8
N$38: D3.C R13.1
N$39: SJ7.2 U6.8
N$40: D4.A R18.2
N$41: L2.P$1 U8.3
N$42: C17.1 U8.1
N$43: JP12.2 JP14.2 S1.2
N$73: D5.C R25.1
N$74: SJ11.2 U10.8
N$75: D6.A R30.2
N$76: L3.P$1 U12.3
N$77: C26.1 U12.1
N$78: JP23.2 JP24.2 S3.2
N$108: D7.C R37.1
N$109: SJ15.2 U14.8
N$110: D8.A R42.2
N$111: L4.P$1 U16.3
N$112: C35.1 U16.1
N$113: JP33.2 JP34.2 S4.2
N$143: D9.C R49.1
N$144: SJ19.2 U18.8
N$145: D10.A R54.2
N$146: L5.P$1 U20.3
N$147: C44.1 U20.1
N$148: JP43.2 JP44.2 S5.2
N$178: D11.C R61.1
N$179: SJ23.2 U22.8
N$180: D12.A R66.2
N$181: L6.P$1 U24.3
N$182: C53.1 U24.1
N$183: JP53.2 JP54.2 S6.2
PROG: R10.2 R11.2 U3.5
PROG1: R14.2 R15.2 U7.5
PROG2: R26.2 R27.2 U11.5
PROG3: R38.2 R39.2 U15.5
PROG4: R50.2 R51.2 U19.5
PROG5: R62.2 R63.2 U23.5
PS: R8.1 SJ2.2 U2.8
PS1: R22.1 SJ6.2 U8.8
PS2: R34.1 SJ10.2 U12.8
PS3: R46.1 SJ14.2 U16.8
PS4: R58.1 SJ18.2 U20.8
PS5: R70.1 SJ22.2 U24.8
QST: R2.2 U1.6
QST1: R17.2 U6.6
QST2: R29.2 U10.6
QST3: R41.2 U14.6
QST4: R53.2 U18.6
QST5: R65.2 U22.6
RST: JP2.1 U4.RES
RST1: JP15.1 U5.RES
RST2: JP25.1 U9.RES
RST3: JP35.1 U13.RES
RST4: JP45.1 U17.RES
RST5: JP55.1 U21.RES
RX: JP8.8 U4.RX
RX1: JP18.8 U5.RX
RX2: JP28.8 U9.RX
RX3: JP38.8 U13.RX
RX4: JP48.8 U17.RX
RX5: JP58.8 U21.RX
SCL: SJ4.2 U1.7
SCL1: SJ8.2 U6.7
SCL2: SJ12.2 U10.7
SCL3: SJ16.2 U14.7
SCL4: SJ20.2 U18.7
SCL5: SJ24.2 U22.7
SCL-A1: JP17.6 SJ8.3 U5.A5
SCL-A2: JP27.6 SJ12.3 U9.A5
SCL-A3: JP37.6 SJ16.3 U13.A5
SCL-A4: JP47.6 SJ20.3 U17.A5
SCL-A5: JP7.6 SJ4.3 U4.A5
SCL-A6: JP57.6 SJ24.3 U21.A5
SCL-R1: SJ8.1 U5.SCL
SCL-R2: SJ12.1 U9.SCL
SCL-R3: SJ4.1 U4.SCL
SCL-R4: SJ16.1 U13.SCL
SCL-R5: SJ20.1 U17.SCL
SCL-R6: SJ24.1 U21.SCL
SDA-A1: JP17.5 SJ7.3 U5.A4
SDA-A2: JP27.5 SJ11.3 U9.A4
SDA-A3: JP37.5 SJ15.3 U13.A4
SDA-A4: JP7.5 SJ3.3 U4.A4
SDA-A5: JP47.5 SJ19.3 U17.A4
SDA-A6: JP57.5 SJ23.3 U21.A4
SDA-R1: SJ7.1 U5.SDA
SDA-R2: SJ11.1 U9.SDA
SDA-R3: SJ3.1 U4.SDA
SDA-R4: SJ15.1 U13.SDA
SDA-R5: SJ19.1 U17.SDA
SDA-R6: SJ23.1 U21.SDA
STAT: R12.2 U3.1
STAT1: R13.2 U7.1
STAT2: R25.2 U11.1
STAT3: R37.2 U15.1
STAT4: R49.2 U19.1
STAT5: R61.2 U23.1
TX: JP8.7 U4.TX
TX1: JP18.7 U5.TX
TX2: JP28.7 U9.TX
TX3: JP38.7 U13.TX
TX4: JP48.7 U17.TX
TX5: JP58.7 U21.TX
UVLO: C6.2 R7.1 R9.2 TP1.P$1 U2.7
UVLO1: C16.2 R23.2 R24.1 TP3.P$1 U8.7
UVLO2: C25.2 R35.2 R36.1 TP5.P$1 U12.7
UVLO3: C34.2 R47.2 R48.1 TP7.P$1 U16.7
UVLO4: C43.2 R59.2 R60.1 TP9.P$1 U20.7
UVLO5: C52.2 R71.2 R72.1 TP11.P$1 U24.7
VBATT: C4.1 C6.1 C9.1 L1.P$2 R1.2 R5.2 R7.2 R8.2 S2.1 U2.5 U3.3 VREG.1 VREG.3
VBATT1: C12.1 C16.1 C18.1 L2.P$2 R16.2 R21.2 R22.2 R24.2 S1.1 U7.3 U8.5 VREG1.1 VREG1.3
VBATT2: C21.1 C25.1 C27.1 L3.P$2 R28.2 R33.2 R34.2 R36.2 S3.1 U11.3 U12.5 VREG2.1 VREG2.3
VBATT3: C30.1 C34.1 C36.1 L4.P$2 R40.2 R45.2 R46.2 R48.2 S4.1 U15.3 U16.5 VREG3.1 VREG3.3
VBATT4: C39.1 C43.1 C45.1 L5.P$2 R52.2 R57.2 R58.2 R60.2 S5.1 U19.3 U20.5 VREG4.1 VREG4.3
VBATT5: C48.1 C52.1 C54.1 L6.P$2 R64.2 R69.2 R70.2 R72.2 S6.1 U23.3 U24.5 VREG5.1 VREG5.3
VBUS: C8.2 D2.A JP4.1 JP11.VBUS U3.4
VBUS1: C11.2 D3.A JP5.VBUS JP6.1 U7.4
VBUS2: C20.2 D5.A JP21.VBUS JP22.1 U11.4
VBUS3: C29.2 D7.A JP31.VBUS JP32.1 U15.4
VBUS4: C38.2 D9.A JP41.VBUS JP42.1 U19.4
VBUS5: C47.2 D11.A JP51.VBUS JP52.1 U23.4
VIN: JP2.6 U4.VIN
VIN1: JP15.6 U5.VIN
VIN2: JP25.6 U9.VIN
VIN3: JP35.6 U13.VIN
VIN4: JP45.6 U17.VIN
VIN5: JP55.6 U21.VIN

## Tracks (layer width: path | path; a pad name or v marks a point on that pad's centre or on a via)
3.3-ARDUINO
  Bottom 0.254: U4.3.3V JP2.2
3.3-ARDUINO1
  Bottom 0.254: U5.3.3V JP15.2
3.3-ARDUINO2
  Bottom 0.254: U9.3.3V JP25.2
3.3-ARDUINO3
  Bottom 0.254: U13.3.3V JP35.2
3.3-ARDUINO4
  Bottom 0.254: U17.3.3V JP45.2
3.3-ARDUINO5
  Bottom 0.254: U21.3.3V JP55.2
3.3V  (via drill 0.51)
  Top 0.254: v26.67,30.99 27.62,31.94 VREG.5 27.72,33.4 27.77,33.45 C7.A | U1.3 24.44,21.14 v24.17,20.87 24.55,20.49 C1.1 24.26,17.31
  Bottom 0.254: v24.17,20.87 24.17,28.43 26.67,30.93 v26.67,30.99 TP2.P$1
3.3V1  (via drill 0.51)
  Top 0.254: v90.17,30.99 91.12,31.94 VREG1.5 91.22,33.4 91.27,33.45 C13.A | U6.3 87.94,21.14 v87.67,20.87 88.05,20.49 C10.1 87.76,17.31
  Bottom 0.254: v87.67,20.87 87.67,28.43 90.17,30.93 v90.17,30.99 TP4.P$1
3.3V2  (via drill 0.51)
  Top 0.254: v153.67,30.99 154.62,31.94 VREG2.5 154.72,33.4 154.77,33.45 156.76,33.45 C22.A | U10.3 151.44,21.14 v151.17,20.87 151.55,20.49 C19.1 151.26,17.31
  Bottom 0.254: v151.17,20.87 151.17,28.43 153.67,30.93 v153.67,30.99 TP6.P$1
3.3V3  (via drill 0.51)
  Top 0.254: v26.67,88.65 27.62,89.6 VREG3.5 27.72,91.06 27.77,91.11 29.76,91.11 C31.A | U14.3 24.44,78.8 v24.17,78.53 24.55,78.15 C28.1 24.26,74.96
  Bottom 0.254: v24.17,78.53 24.17,86.09 26.67,88.59 v26.67,88.65 TP8.P$1
3.3V4  (via drill 0.51)
  Top 0.254: v90.17,88.65 91.12,89.6 VREG4.5 91.22,91.06 91.27,91.11 93.26,91.11 C40.A | U18.3 87.94,78.8 v87.67,78.53 88.05,78.15 C37.1 87.76,74.96
  Bottom 0.254: v87.67,78.53 87.67,86.09 90.17,88.59 v90.17,88.65 TP10.P$1
3.3V5  (via drill 0.51)
  Top 0.254: v153.67,88.65 154.62,89.6 VREG5.5 154.72,91.06 154.77,91.11 156.76,91.11 C49.A | U22.3 151.44,78.8 v151.17,78.53 151.55,78.15 C46.1 151.26,74.96
  Bottom 0.254: v151.17,78.53 151.17,86.09 153.67,88.59 v153.67,88.65 TP12.P$1
5V
  Top 0.254: 31.77,39.85 29.21,42.42 17.63,42.42 | 17.63,42.42 16.51,42.42 14.48,40.39 14.48,38.61 | 17.63,42.42 R4.2 | 14.48,38.61 14.48,35.99 15.17,35.3 U2.2 | 31.77,28.68 31.77,25.73 32.56,24.94 32.56,22.48 31.75,21.67 31.75,17.02 33.02,15.75 39.37,15.75 | 31.77,39.85 31.77,28.68 arc90 31.77,28.68 | 31.77,39.85 arc90 31.77,39.85 | JP2.3 39.37,15.75 | 39.37,15.75 U4.5V | C3.1 14.48,38.61 | R3.1 31.77,28.7 31.77,28.68
5V1
  Top 0.254: 95.28,39.85 92.71,42.42 81.13,42.42 | 81.13,42.42 80.01,42.42 77.98,40.39 77.98,38.61 | 81.13,42.42 R20.2 | 77.98,38.61 77.98,35.99 78.67,35.3 U8.2 | 95.28,28.68 95.28,25.73 96.06,24.94 96.06,22.48 95.25,21.67 95.25,17.02 96.52,15.75 102.87,15.75 | 95.28,39.85 95.28,28.68 arc90 95.28,28.68 | 95.28,39.85 arc90 95.28,39.85 | JP15.3 102.87,15.75 | 102.87,15.75 U5.5V | C15.1 77.98,38.61 | R18.1 95.28,28.7 95.28,28.68
5V2
  Top 0.254: 158.78,39.85 156.21,42.42 144.63,42.42 | 144.63,42.42 143.51,42.42 141.48,40.39 141.48,38.61 | 144.63,42.42 R32.2 | 141.48,38.61 141.48,35.99 142.17,35.3 U12.2 | 158.78,28.68 158.78,25.73 159.56,24.94 159.56,22.48 158.75,21.67 158.75,17.02 160.02,15.75 166.37,15.75 | 158.78,39.85 158.78,28.68 arc90 158.78,28.68 | 158.78,39.85 arc90 158.78,39.85 | JP25.3 166.37,15.75 | 166.37,15.75 U9.5V | C24.1 141.48,38.61 | R30.1 158.78,28.7 158.78,28.68
5V3
  Top 0.254: 31.77,97.51 29.21,100.08 17.63,100.08 | 17.63,100.08 16.51,100.08 14.48,98.04 14.48,96.27 | 17.63,100.08 R44.2 | 14.48,96.27 14.48,93.65 15.17,92.96 U16.2 | 31.77,86.33 31.77,83.39 32.56,82.6 32.56,80.14 31.75,79.32 31.75,74.68 33.02,73.41 39.37,73.41 | 31.77,97.51 31.77,86.33 arc90 31.77,86.33 | 31.77,97.51 arc90 31.77,97.51 | JP35.3 39.37,73.41 | 39.37,73.41 U13.5V | C33.1 14.48,96.27 | R42.1 31.77,86.36 31.77,86.33
5V4
  Top 0.254: 95.28,97.51 92.71,100.08 81.13,100.08 | 81.13,100.08 80.01,100.08 77.98,98.04 77.98,96.27 | 81.13,100.08 R56.2 | 77.98,96.27 77.98,93.65 78.67,92.96 U20.2 | 95.28,86.33 95.28,83.39 96.06,82.6 96.06,80.14 95.25,79.32 95.25,74.68 96.52,73.41 102.87,73.41 | 95.28,97.51 95.28,86.33 arc90 95.28,86.33 | 95.28,97.51 arc90 95.28,97.51 | JP45.3 102.87,73.41 | 102.87,73.41 U17.5V | C42.1 77.98,96.27 | R54.1 95.28,86.36 95.28,86.33
5V5
  Top 0.254: 158.78,97.51 156.21,100.08 144.63,100.08 | 144.63,100.08 143.51,100.08 141.48,98.04 141.48,96.27 | 144.63,100.08 R68.2 | 141.48,96.27 141.48,93.65 142.17,92.96 U24.2 | 158.78,86.33 158.78,83.39 159.56,82.6 159.56,80.14 158.75,79.32 158.75,74.68 160.02,73.41 166.37,73.41 | 158.78,97.51 158.78,86.33 arc90 158.78,86.33 | 158.78,97.51 arc90 158.78,97.51 | JP55.3 166.37,73.41 | 166.37,73.41 U21.5V | C51.1 141.48,96.27 | R66.1 158.78,86.36 158.78,86.33
A0
  Bottom 0.254: JP7.1 U4.A0
A1
  Bottom 0.254: U4.A1 JP7.2 54.61,19.8
A2
  Bottom 0.254: JP7.3 U4.A2
A3
  Bottom 0.254: JP7.4 U4.A3
A4
  Bottom 0.254: JP17.4 U5.A3
A5
  Bottom 0.254: JP17.3 U5.A2
A6
  Bottom 0.254: U5.A1 JP17.2 118.11,19.8
A7
  Bottom 0.254: JP17.1 U5.A0
A8
  Bottom 0.254: JP27.4 U9.A3
A9
  Bottom 0.254: JP27.3 U9.A2
A10
  Bottom 0.254: U9.A1 JP27.2 181.61,19.8
A11
  Bottom 0.254: JP27.1 U9.A0
A12
  Bottom 0.254: JP37.4 U13.A3
A13
  Bottom 0.254: JP37.3 U13.A2
A14
  Bottom 0.254: U13.A1 JP37.2 54.61,77.46
A15
  Bottom 0.254: JP37.1 U13.A0
A16
  Bottom 0.254: JP47.4 U17.A3
A17
  Bottom 0.254: JP47.3 U17.A2
A18
  Bottom 0.254: U17.A1 JP47.2 118.11,77.46
A19
  Bottom 0.254: JP47.1 U17.A0
A20
  Bottom 0.254: JP57.4 U21.A3
A21
  Bottom 0.254: JP57.3 U21.A2
A22
  Bottom 0.254: U21.A1 JP57.2 181.61,77.46
A23
  Bottom 0.254: JP57.1 U21.A0
ALT  (via drill 0.51)
  Top 0.254: U1.5 28.66,20.64 28.78,20.52 28.78,19.94 28.19,19.36 27.33,19.36 v27.28,19.41
  Bottom 0.254: v27.28,19.41 27.81,19.94 27.81,39.24 SJ1.1
ALT1  (via drill 0.51)
  Top 0.254: U6.5 92.17,20.64 92.28,20.52 92.28,19.94 91.69,19.36 90.83,19.36 v90.78,19.41
  Bottom 0.254: v90.78,19.41 91.31,19.94 91.31,39.24 SJ5.1
ALT2  (via drill 0.51)
  Top 0.254: U10.5 155.66,20.64 155.78,20.52 155.78,19.94 155.19,19.36 154.33,19.36 v154.28,19.41
  Bottom 0.254: v154.28,19.41 154.81,19.94 154.81,39.24 SJ9.1
ALT3  (via drill 0.51)
  Top 0.254: U14.5 28.66,78.3 28.78,78.18 28.78,77.6 28.19,77.01 27.33,77.01 v27.28,77.06
  Bottom 0.254: v27.28,77.06 27.81,77.6 27.81,96.9 SJ13.1
ALT4  (via drill 0.51)
  Top 0.254: U18.5 92.17,78.3 92.28,78.18 92.28,77.6 91.69,77.01 90.83,77.01 v90.78,77.06
  Bottom 0.254: v90.78,77.06 91.31,77.6 91.31,96.9 SJ17.1
ALT5  (via drill 0.51)
  Top 0.254: U22.5 155.66,78.3 155.78,78.18 155.78,77.6 155.19,77.01 154.33,77.01 v154.28,77.06
  Bottom 0.254: v154.28,77.06 154.81,77.6 154.81,96.9 SJ21.1
AREF
  Bottom 0.254: U4.AREF JP3.1
AREF1
  Bottom 0.254: U5.AREF JP16.1
AREF2
  Bottom 0.254: U9.AREF JP26.1
AREF3
  Bottom 0.254: U13.AREF JP36.1
AREF4
  Bottom 0.254: U17.AREF JP46.1
AREF5
  Bottom 0.254: U21.AREF JP56.1
CELL
  Top 0.254: U1.2 24.54,21.64 24.16,22.02 R1.1 C2.1 26.01,23.84
CELL1
  Top 0.254: U6.2 88.04,21.64 87.66,22.02 R16.1 C14.1 89.51,23.84
CELL2
  Top 0.254: U10.2 151.54,21.64 151.16,22.02 R28.1 C23.1 153.01,23.84
CELL3
  Top 0.254: U14.2 24.54,79.3 24.16,79.68 R40.1 C32.1 26.01,81.5
CELL4
  Top 0.254: U18.2 88.04,79.3 87.66,79.68 R52.1 C41.1 89.51,81.5
CELL5
  Top 0.254: U22.2 151.54,79.3 151.16,79.68 R64.1 C50.1 153.01,81.5
D1
  Bottom 0.254: U5.D3 JP18.5
D2
  Bottom 0.254: SJ1.2 29.21,46.23 30.48,47.5 30.48,51.41 32.21,53.14 57.73,53.14 57.73,53.16 JP8.6 U4.D2
D3
  Bottom 0.254: U4.D3 JP8.5
D4
  Bottom 0.254: U4.D4 JP8.4
D5
  Bottom 0.254: U4.D5 JP8.3
D6
  Bottom 0.254: U4.D6 JP8.2
D7
  Bottom 0.254: U4.D7 JP8.1
D8
  Bottom 0.254: U4.D8 JP3.8
D9
  Bottom 0.254: U4.D9 JP3.7
D10
  Bottom 0.254: U4.D10 JP3.6
D11
  Bottom 0.254: U4.D11 JP3.5
D12
  Bottom 0.254: U4.D12 JP3.4
D13
  Bottom 0.254: U4.D13 JP3.3
D14
  Bottom 0.254: U5.D4 JP18.4
D15
  Bottom 0.254: U5.D5 JP18.3
D16
  Bottom 0.254: U5.D7 JP18.1
D17
  Bottom 0.254: U5.D6 JP18.2
D18
  Bottom 0.254: U5.D8 JP16.8
D19
  Bottom 0.254: U5.D9 JP16.7
D20
  Bottom 0.254: U5.D10 JP16.6
D21
  Bottom 0.254: U5.D11 JP16.5
D22
  Bottom 0.254: U5.D12 JP16.4
D23
  Bottom 0.254: U5.D13 JP16.3
D24
  Bottom 0.254: SJ5.2 92.71,46.23 93.98,47.5 93.98,51.41 95.71,53.14 121.23,53.14 121.23,53.16 JP18.6 U5.D2
D25
  Bottom 0.254: U9.D3 JP28.5
D26
  Bottom 0.254: U9.D4 JP28.4
D27
  Bottom 0.254: U9.D5 JP28.3
D28
  Bottom 0.254: U9.D7 JP28.1
D29
  Bottom 0.254: U9.D6 JP28.2
D30
  Bottom 0.254: U9.D8 JP26.8
D31
  Bottom 0.254: U9.D9 JP26.7
D32
  Bottom 0.254: U9.D10 JP26.6
D33
  Bottom 0.254: U9.D11 JP26.5
D34
  Bottom 0.254: U9.D12 JP26.4
D35
  Bottom 0.254: U9.D13 JP26.3
D36
  Bottom 0.254: SJ9.2 156.21,46.23 157.48,47.5 157.48,51.41 159.21,53.14 184.73,53.14 184.73,53.16 JP28.6 U9.D2
D37
  Bottom 0.254: U13.D3 JP38.5
D38
  Bottom 0.254: U13.D4 JP38.4
D39
  Bottom 0.254: U13.D5 JP38.3
D40
  Bottom 0.254: U13.D7 JP38.1
D41
  Bottom 0.254: U13.D6 JP38.2
D42
  Bottom 0.254: U13.D8 JP36.8
D43
  Bottom 0.254: U13.D9 JP36.7
D44
  Bottom 0.254: U13.D10 JP36.6
D45
  Bottom 0.254: U13.D11 JP36.5
D46
  Bottom 0.254: U13.D12 JP36.4
D47
  Bottom 0.254: U13.D13 JP36.3
D48
  Bottom 0.254: SJ13.2 29.21,103.89 30.48,105.16 30.48,109.07 32.21,110.8 57.73,110.8 57.73,110.82 JP38.6 U13.D2
D49
  Bottom 0.254: U17.D3 JP48.5
D50
  Bottom 0.254: U17.D4 JP48.4
D51
  Bottom 0.254: U17.D5 JP48.3
D52
  Bottom 0.254: U17.D7 JP48.1
D53
  Bottom 0.254: U17.D6 JP48.2
D54
  Bottom 0.254: U17.D8 JP46.8
D55
  Bottom 0.254: U17.D9 JP46.7
D56
  Bottom 0.254: U17.D10 JP46.6
D57
  Bottom 0.254: U17.D11 JP46.5
D58
  Bottom 0.254: U17.D12 JP46.4
D59
  Bottom 0.254: U17.D13 JP46.3
D60
  Bottom 0.254: SJ17.2 92.71,103.89 93.98,105.16 93.98,109.07 95.71,110.8 121.23,110.8 121.23,110.82 JP48.6 U17.D2
D61
  Bottom 0.254: U21.D3 JP58.5
D62
  Bottom 0.254: U21.D4 JP58.4
D63
  Bottom 0.254: U21.D5 JP58.3
D64
  Bottom 0.254: U21.D7 JP58.1
D65
  Bottom 0.254: U21.D6 JP58.2
D66
  Bottom 0.254: U21.D8 JP56.8
D67
  Bottom 0.254: U21.D9 JP56.7
D68
  Bottom 0.254: U21.D10 JP56.6
D69
  Bottom 0.254: U21.D11 JP56.5
D70
  Bottom 0.254: U21.D12 JP56.4
D71
  Bottom 0.254: U21.D13 JP56.3
D72
  Bottom 0.254: SJ21.2 156.21,103.89 157.48,105.16 157.48,109.07 159.21,110.8 184.73,110.8 184.73,110.82 JP58.6 U21.D2
EN
  Top 0.254: U2.6 19.97,33.8 20.14,33.63 20.14,30.06 R5.1
EN1
  Top 0.254: U8.6 83.47,33.8 83.64,33.63 83.64,30.06 R21.1
EN2
  Top 0.254: U12.6 146.97,33.8 147.14,33.63 147.14,30.06 R33.1
EN3
  Top 0.254: U16.6 19.97,91.46 20.14,91.29 20.14,87.72 R45.1
EN4
  Top 0.254: U20.6 83.47,91.46 83.64,91.29 83.64,87.72 R57.1
EN5
  Top 0.254: U24.6 146.97,91.46 147.14,91.29 147.14,87.72 R69.1
FB
  Top 0.254: R4.1 R6.2 19.06,37.77 19.94,37.77 20.27,37.44 20.27,36.14 19.92,35.8 U2.10
FB1
  Top 0.254: R20.1 R19.2 82.56,37.77 83.44,37.77 83.77,37.44 83.77,36.14 83.42,35.8 U8.10
FB2
  Top 0.254: R32.1 R31.2 146.06,37.77 146.94,37.77 147.27,37.44 147.27,36.14 146.92,35.8 U12.10
FB3
  Top 0.254: R44.1 R43.2 19.06,95.43 19.94,95.43 20.27,95.1 20.27,93.8 19.92,93.46 U16.10
FB4
  Top 0.254: R56.1 R55.2 82.56,95.43 83.44,95.43 83.77,95.1 83.77,93.8 83.42,93.46 U20.10
FB5
  Top 0.254: R68.1 R67.2 146.06,95.43 146.94,95.43 147.27,95.1 147.27,93.8 146.92,93.46 U24.10
GND  (via drill 0.38, 0.51)
  Top 0.254: U1.1 25.95,22.14 U1.EP 25.95,20.64 U1.4 | U2.13 18.03,32.64 | 17.91,32.13 17.53,32.51 U2.14 17.53,34.55 U2.15 | U2.11 18.03,35.05 U2.15 | U2.12 17.53,35.05 U2.15 | U2.4 17.28,34.3 U2.15 | U2.9 18.28,35.3 U2.15
  other vias: 16.61,40.92 21.84,41.22 18.29,32 42.94,22.84 63.5,23.37 17.77,35.33 17.79,34.37
  pour Bottom (isolate 0.305): 10.16,10.67 10.16,64.01 69.85,64.01 69.85,10.67
  pour Top (isolate 0.305): 10.16,10.67 10.16,64.01 69.85,64.01 69.85,10.67
GND1  (via drill 0.38, 0.51)
  Top 0.254: U6.1 89.44,22.14 U6.EP 89.44,20.64 U6.4 | U8.13 81.53,32.64 | 81.41,32.13 81.03,32.51 U8.14 81.03,34.55 U8.15 | U8.11 81.53,35.05 U8.15 | U8.12 81.03,35.05 U8.15 | U8.4 80.78,34.3 U8.15 | U8.9 81.78,35.3 U8.15
  other vias: 80.11,40.92 85.34,41.22 81.79,32 106.44,22.84 127,23.37 81.27,35.33 81.29,34.37
  pour Bottom (isolate 0.305): 73.66,10.67 73.66,64.01 133.35,64.01 133.35,10.67
  pour Top (isolate 0.305): 73.66,10.67 73.66,64.01 133.35,64.01 133.35,10.67
GND2  (via drill 0.38, 0.51)
  Top 0.254: U10.1 152.94,22.14 U10.EP 152.94,20.64 U10.4 | U12.13 145.03,32.64 | 144.91,32.13 144.53,32.51 U12.14 144.53,34.55 U12.15 | U12.11 145.03,35.05 U12.15 | U12.12 144.53,35.05 U12.15 | U12.4 144.28,34.3 U12.15 | U12.9 145.28,35.3 U12.15
  other vias: 143.61,40.92 148.84,41.22 145.29,32 169.94,22.84 190.5,23.37 144.77,35.33 144.79,34.37
  pour Bottom (isolate 0.305): 137.16,10.67 137.16,64.01 196.85,64.01 196.85,10.67
  pour Top (isolate 0.305): 137.16,10.67 137.16,64.01 196.85,64.01 196.85,10.67
GND3  (via drill 0.38, 0.51)
  Top 0.254: U14.1 25.95,79.8 U14.EP 25.95,78.3 U14.4 | U16.13 18.03,90.3 | 17.91,89.79 17.53,90.17 U16.14 17.53,92.21 U16.15 | U16.11 18.03,92.71 U16.15 | U16.12 17.53,92.71 U16.15 | U16.4 17.28,91.96 U16.15 | U16.9 18.28,92.96 U16.15
  other vias: 16.61,98.58 21.84,98.88 18.29,89.66 42.94,80.5 63.5,81.03 17.77,92.99 17.79,92.03
  pour Bottom (isolate 0.305): 10.16,68.33 10.16,121.67 69.85,121.67 69.85,68.33
  pour Top (isolate 0.305): 10.16,68.33 10.16,121.67 69.85,121.67 69.85,68.33
GND4  (via drill 0.38, 0.51)
  Top 0.254: U18.1 89.44,79.8 U18.EP 89.44,78.3 U18.4 | U20.13 81.53,90.3 | 81.41,89.79 81.03,90.17 U20.14 81.03,92.21 U20.15 | U20.11 81.53,92.71 U20.15 | U20.12 81.03,92.71 U20.15 | U20.4 80.78,91.96 U20.15 | U20.9 81.78,92.96 U20.15
  other vias: 80.11,98.58 85.34,98.88 81.79,89.66 106.44,80.5 127,81.03 81.27,92.99 81.29,92.03
  pour Bottom (isolate 0.305): 73.66,68.33 73.66,121.67 133.35,121.67 133.35,68.33
  pour Top (isolate 0.305): 73.66,68.33 73.66,121.67 133.35,121.67 133.35,68.33
GND5  (via drill 0.38, 0.51)
  Top 0.254: U22.1 152.94,79.8 U22.EP 152.94,78.3 U22.4 | U24.13 145.03,90.3 | 144.91,89.79 144.53,90.17 U24.14 144.53,92.21 U24.15 | U24.11 145.03,92.71 U24.15 | U24.12 144.53,92.71 U24.15 | U24.4 144.28,91.96 U24.15 | U24.9 145.28,92.96 U24.15
  other vias: 143.61,98.58 148.84,98.88 145.29,89.66 169.94,80.5 190.5,81.03 144.77,92.99 144.79,92.03
  pour Bottom (isolate 0.305): 137.16,68.33 137.16,121.67 196.85,121.67 196.85,68.33
  pour Top (isolate 0.305): 137.16,68.33 137.16,121.67 196.85,121.67 196.85,68.33
N$1
  Top 0.254: D1.A 28.36,27.2 R3.2
N$3
  Top 0.254: U2.3 13.92,34.8 L1.P$1
N$4
  Top 0.254: U2.1 15.51,35.8 15.24,36.07 15.24,37.59 15.42,37.77 16.19,37.77 C5.1
N$5
  Top 0.254: D2.C 31.3,45.97 31.3,44.48 R12.1
N$7
  Top 0.508: 15.24,21.83 11.7,21.83 JP1.2 | S2.2 20.56,15.25 15.24,20.57 15.24,21.83 | JP13.2 15.26,21.85 15.24,21.83
N$8  (via drill 1.02 pad 1.88)
  other vias: 62.23,51.31
N$9  (via drill 1.02 pad 1.88)
  other vias: 64.77,51.31
N$10  (via drill 1.02 pad 1.88)
  other vias: 62.23,48.77
N$11  (via drill 1.02 pad 1.88)
  other vias: 64.77,48.77
N$12  (via drill 1.02 pad 1.88)
  other vias: 67.31,48.77
N$13  (via drill 1.02 pad 1.88)
  other vias: 62.23,46.23
N$14  (via drill 1.02 pad 1.88)
  other vias: 64.77,46.23
N$15  (via drill 1.02 pad 1.88)
  other vias: 67.31,46.23
N$16  (via drill 1.02 pad 1.88)
  other vias: 62.23,43.69
N$17  (via drill 1.02 pad 1.88)
  other vias: 64.77,43.69
N$18  (via drill 1.02 pad 1.88)
  other vias: 67.31,43.69
N$19  (via drill 1.02 pad 1.88)
  other vias: 64.77,41.15
N$20  (via drill 0.51)
  Top 0.254: U1.8 28.84,22.14 29.34,22.63 29.34,23.24 v29.21,23.37 | v31.75,48.77 28.19,52.32 23.11,52.32 21.59,53.85 v21.59,53.92
  Bottom 0.254: v29.21,23.37 33.02,27.18 33.02,47.5 v31.75,48.77 | v21.59,53.92 21.59,58.04 21.97,58.42 SJ3.2
N$21  (via drill 1.02 pad 1.88)
  other vias: 67.31,41.15
N$22  (via drill 1.02 pad 1.88)
  other vias: 64.77,38.61
N$23  (via drill 1.02 pad 1.88)
  other vias: 67.31,38.61
N$24  (via drill 1.02 pad 1.88)
  other vias: 64.77,36.07
N$25  (via drill 1.02 pad 1.88)
  other vias: 67.31,36.07
N$26  (via drill 1.02 pad 1.88)
  other vias: 62.23,33.53
N$27  (via drill 1.02 pad 1.88)
  other vias: 64.77,33.53
N$28  (via drill 1.02 pad 1.88)
  other vias: 67.31,33.53
N$29  (via drill 1.02 pad 1.88)
  other vias: 62.23,30.99
N$30  (via drill 1.02 pad 1.88)
  other vias: 64.77,30.99
N$31  (via drill 1.02 pad 1.88)
  other vias: 67.31,30.99
N$32  (via drill 1.02 pad 1.88)
  other vias: 62.23,28.45
N$33  (via drill 1.02 pad 1.88)
  other vias: 62.23,25.91
N$34  (via drill 1.02 pad 1.88)
  other vias: 64.77,28.45
N$35  (via drill 1.02 pad 1.88)
  other vias: 64.77,25.91
N$36  (via drill 1.02 pad 1.88)
  other vias: 67.31,28.45
N$37  (via drill 1.02 pad 1.88)
  other vias: 67.31,25.91
N$38
  Top 0.254: D3.C 94.81,45.97 94.81,44.48 R13.1
N$39  (via drill 0.51)
  Top 0.254: U6.8 92.34,22.14 92.84,22.63 92.84,23.24 v92.71,23.37 | v95.25,48.77 91.69,52.32 86.61,52.32 85.09,53.85 v85.09,53.92
  Bottom 0.254: v92.71,23.37 96.52,27.18 96.52,47.5 v95.25,48.77 | v85.09,53.92 85.09,58.04 85.47,58.42 SJ7.2
N$40
  Top 0.254: D4.A 91.86,27.2 R18.2
N$41
  Top 0.254: U8.3 77.42,34.8 L2.P$1
N$42
  Top 0.254: U8.1 79.01,35.8 78.74,36.07 78.74,37.59 78.92,37.77 79.69,37.77 C17.1
N$43
  Top 0.508: 78.74,21.83 75.2,21.83 JP12.2 | S1.2 84.06,15.25 78.74,20.57 78.74,21.83 | JP14.2 78.76,21.85 78.74,21.83
N$44  (via drill 1.02 pad 1.88)
  other vias: 125.73,51.31
N$45  (via drill 1.02 pad 1.88)
  other vias: 128.27,51.31
N$46  (via drill 1.02 pad 1.88)
  other vias: 125.73,48.77
N$47  (via drill 1.02 pad 1.88)
  other vias: 128.27,48.77
N$48  (via drill 1.02 pad 1.88)
  other vias: 130.81,48.77
N$49  (via drill 1.02 pad 1.88)
  other vias: 125.73,46.23
N$50  (via drill 1.02 pad 1.88)
  other vias: 128.27,46.23
N$51  (via drill 1.02 pad 1.88)
  other vias: 130.81,46.23
N$52  (via drill 1.02 pad 1.88)
  other vias: 125.73,43.69
N$53  (via drill 1.02 pad 1.88)
  other vias: 128.27,43.69
N$54  (via drill 1.02 pad 1.88)
  other vias: 130.81,43.69
N$55  (via drill 1.02 pad 1.88)
  other vias: 128.27,41.15
N$56  (via drill 1.02 pad 1.88)
  other vias: 130.81,41.15
N$57  (via drill 1.02 pad 1.88)
  other vias: 128.27,38.61
N$58  (via drill 1.02 pad 1.88)
  other vias: 130.81,38.61
N$59  (via drill 1.02 pad 1.88)
  other vias: 128.27,36.07
N$60  (via drill 1.02 pad 1.88)
  other vias: 130.81,36.07
N$61  (via drill 1.02 pad 1.88)
  other vias: 125.73,33.53
N$62  (via drill 1.02 pad 1.88)
  other vias: 128.27,33.53
N$63  (via drill 1.02 pad 1.88)
  other vias: 130.81,33.53
N$64  (via drill 1.02 pad 1.88)
  other vias: 125.73,30.99
N$65  (via drill 1.02 pad 1.88)
  other vias: 128.27,30.99
N$66  (via drill 1.02 pad 1.88)
  other vias: 130.81,30.99
N$67  (via drill 1.02 pad 1.88)
  other vias: 125.73,28.45
N$68  (via drill 1.02 pad 1.88)
  other vias: 125.73,25.91
N$69  (via drill 1.02 pad 1.88)
  other vias: 128.27,28.45
N$70  (via drill 1.02 pad 1.88)
  other vias: 128.27,25.91
N$71  (via drill 1.02 pad 1.88)
  other vias: 130.81,28.45
N$72  (via drill 1.02 pad 1.88)
  other vias: 130.81,25.91
N$73
  Top 0.254: D5.C 158.31,45.97 158.31,44.48 R25.1
N$74  (via drill 0.51)
  Top 0.254: U10.8 155.84,22.14 156.34,22.63 156.34,23.24 v156.21,23.37 | v158.75,48.77 155.19,52.32 150.11,52.32 148.59,53.85 v148.59,53.92
  Bottom 0.254: v156.21,23.37 160.02,27.18 160.02,47.5 v158.75,48.77 | v148.59,53.92 148.59,58.04 148.97,58.42 SJ11.2
N$75
  Top 0.254: D6.A 155.36,27.2 R30.2
N$76
  Top 0.254: U12.3 140.92,34.8 L3.P$1
N$77
  Top 0.254: U12.1 142.51,35.8 142.24,36.07 142.24,37.59 142.42,37.77 143.19,37.77 C26.1
N$78
  Top 0.508: 142.24,21.83 138.7,21.83 JP23.2 | S3.2 147.56,15.25 142.24,20.57 142.24,21.83 | JP24.2 142.26,21.85 142.24,21.83
N$79  (via drill 1.02 pad 1.88)
  other vias: 189.23,51.31
N$80  (via drill 1.02 pad 1.88)
  other vias: 191.77,51.31
N$81  (via drill 1.02 pad 1.88)
  other vias: 189.23,48.77
N$82  (via drill 1.02 pad 1.88)
  other vias: 191.77,48.77
N$83  (via drill 1.02 pad 1.88)
  other vias: 194.31,48.77
N$84  (via drill 1.02 pad 1.88)
  other vias: 189.23,46.23
N$85  (via drill 1.02 pad 1.88)
  other vias: 191.77,46.23
N$86  (via drill 1.02 pad 1.88)
  other vias: 194.31,46.23
N$87  (via drill 1.02 pad 1.88)
  other vias: 189.23,43.69
N$88  (via drill 1.02 pad 1.88)
  other vias: 191.77,43.69
N$89  (via drill 1.02 pad 1.88)
  other vias: 194.31,43.69
N$90  (via drill 1.02 pad 1.88)
  other vias: 191.77,41.15
N$91  (via drill 1.02 pad 1.88)
  other vias: 194.31,41.15
N$92  (via drill 1.02 pad 1.88)
  other vias: 191.77,38.61
N$93  (via drill 1.02 pad 1.88)
  other vias: 194.31,38.61
N$94  (via drill 1.02 pad 1.88)
  other vias: 191.77,36.07
N$95  (via drill 1.02 pad 1.88)
  other vias: 194.31,36.07
N$96  (via drill 1.02 pad 1.88)
  other vias: 189.23,33.53
N$97  (via drill 1.02 pad 1.88)
  other vias: 191.77,33.53
N$98  (via drill 1.02 pad 1.88)
  other vias: 194.31,33.53
N$99  (via drill 1.02 pad 1.88)
  other vias: 189.23,30.99
N$100  (via drill 1.02 pad 1.88)
  other vias: 191.77,30.99
N$101  (via drill 1.02 pad 1.88)
  other vias: 194.31,30.99
N$102  (via drill 1.02 pad 1.88)
  other vias: 189.23,28.45
N$103  (via drill 1.02 pad 1.88)
  other vias: 189.23,25.91
N$104  (via drill 1.02 pad 1.88)
  other vias: 191.77,28.45
N$105  (via drill 1.02 pad 1.88)
  other vias: 191.77,25.91
N$106  (via drill 1.02 pad 1.88)
  other vias: 194.31,28.45
N$107  (via drill 1.02 pad 1.88)
  other vias: 194.31,25.91
N$108
  Top 0.254: D7.C 31.3,103.63 31.3,102.13 R37.1
N$109  (via drill 0.51)
  Top 0.254: U14.8 28.84,79.8 29.34,80.29 29.34,80.9 v29.21,81.03 | v31.75,106.43 28.19,109.98 23.11,109.98 21.59,111.51 v21.59,111.58
  Bottom 0.254: v29.21,81.03 33.02,84.84 33.02,105.16 v31.75,106.43 | v21.59,111.58 21.59,115.7 21.97,116.08 SJ15.2
N$110
  Top 0.254: D8.A 28.36,84.86 R42.2
N$111
  Top 0.254: U16.3 13.92,92.46 L4.P$1
N$112